# Altium PCB 3 motors 1 board.PcbDocFinal.PcbDoc (part 1 of 2)
Units mil, origin at the board's own origin, x right, y up, seen from the top; angles counter-clockwise.
Board outline 4145 x 3550 mil, 4 copper layers (Top Layer, GND, PWR, Bottom Layer), stack 37.817 mil thick; 71 components, 55 nets, 301 pads, 107 vias.
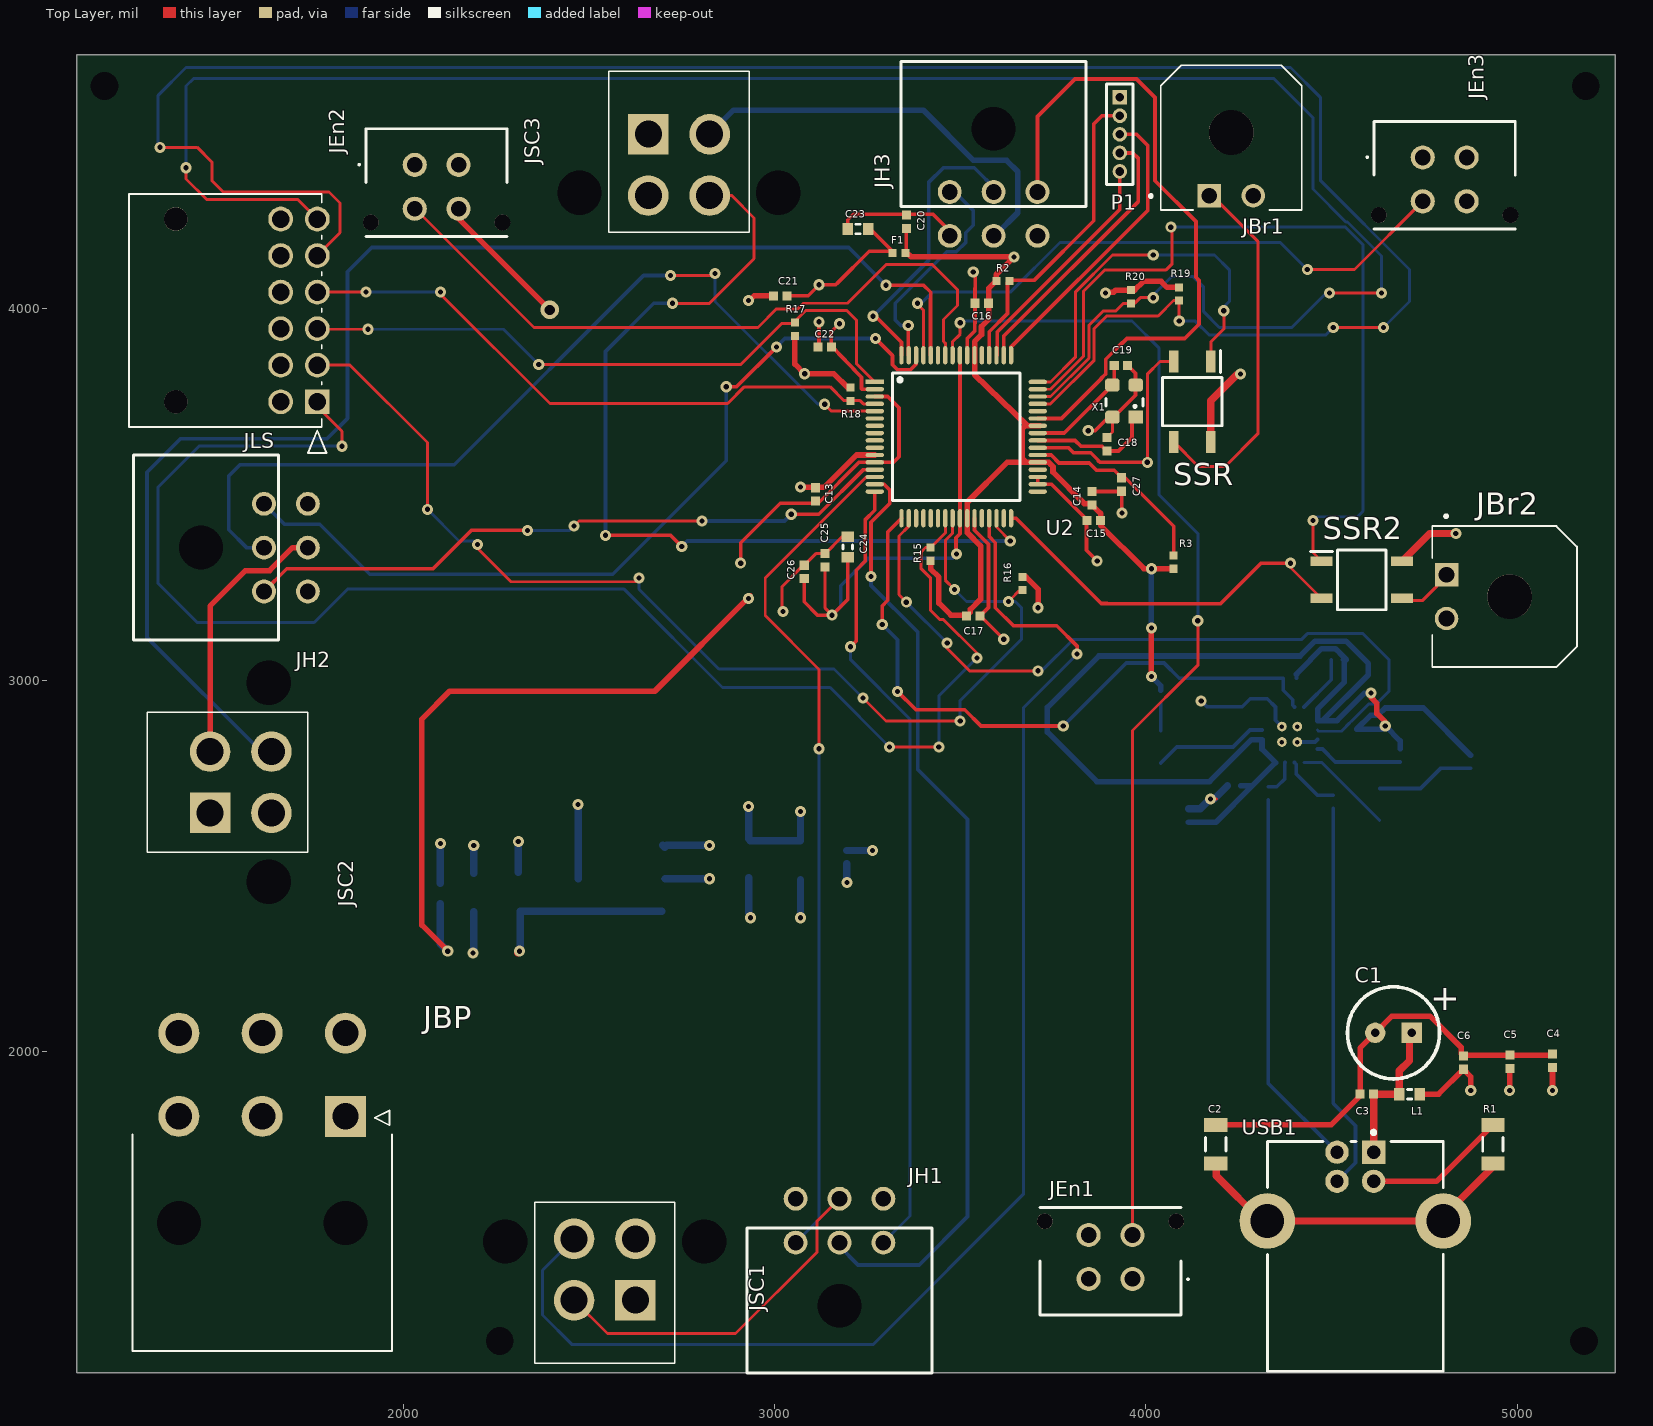
[diagram p0: Top Layer view]
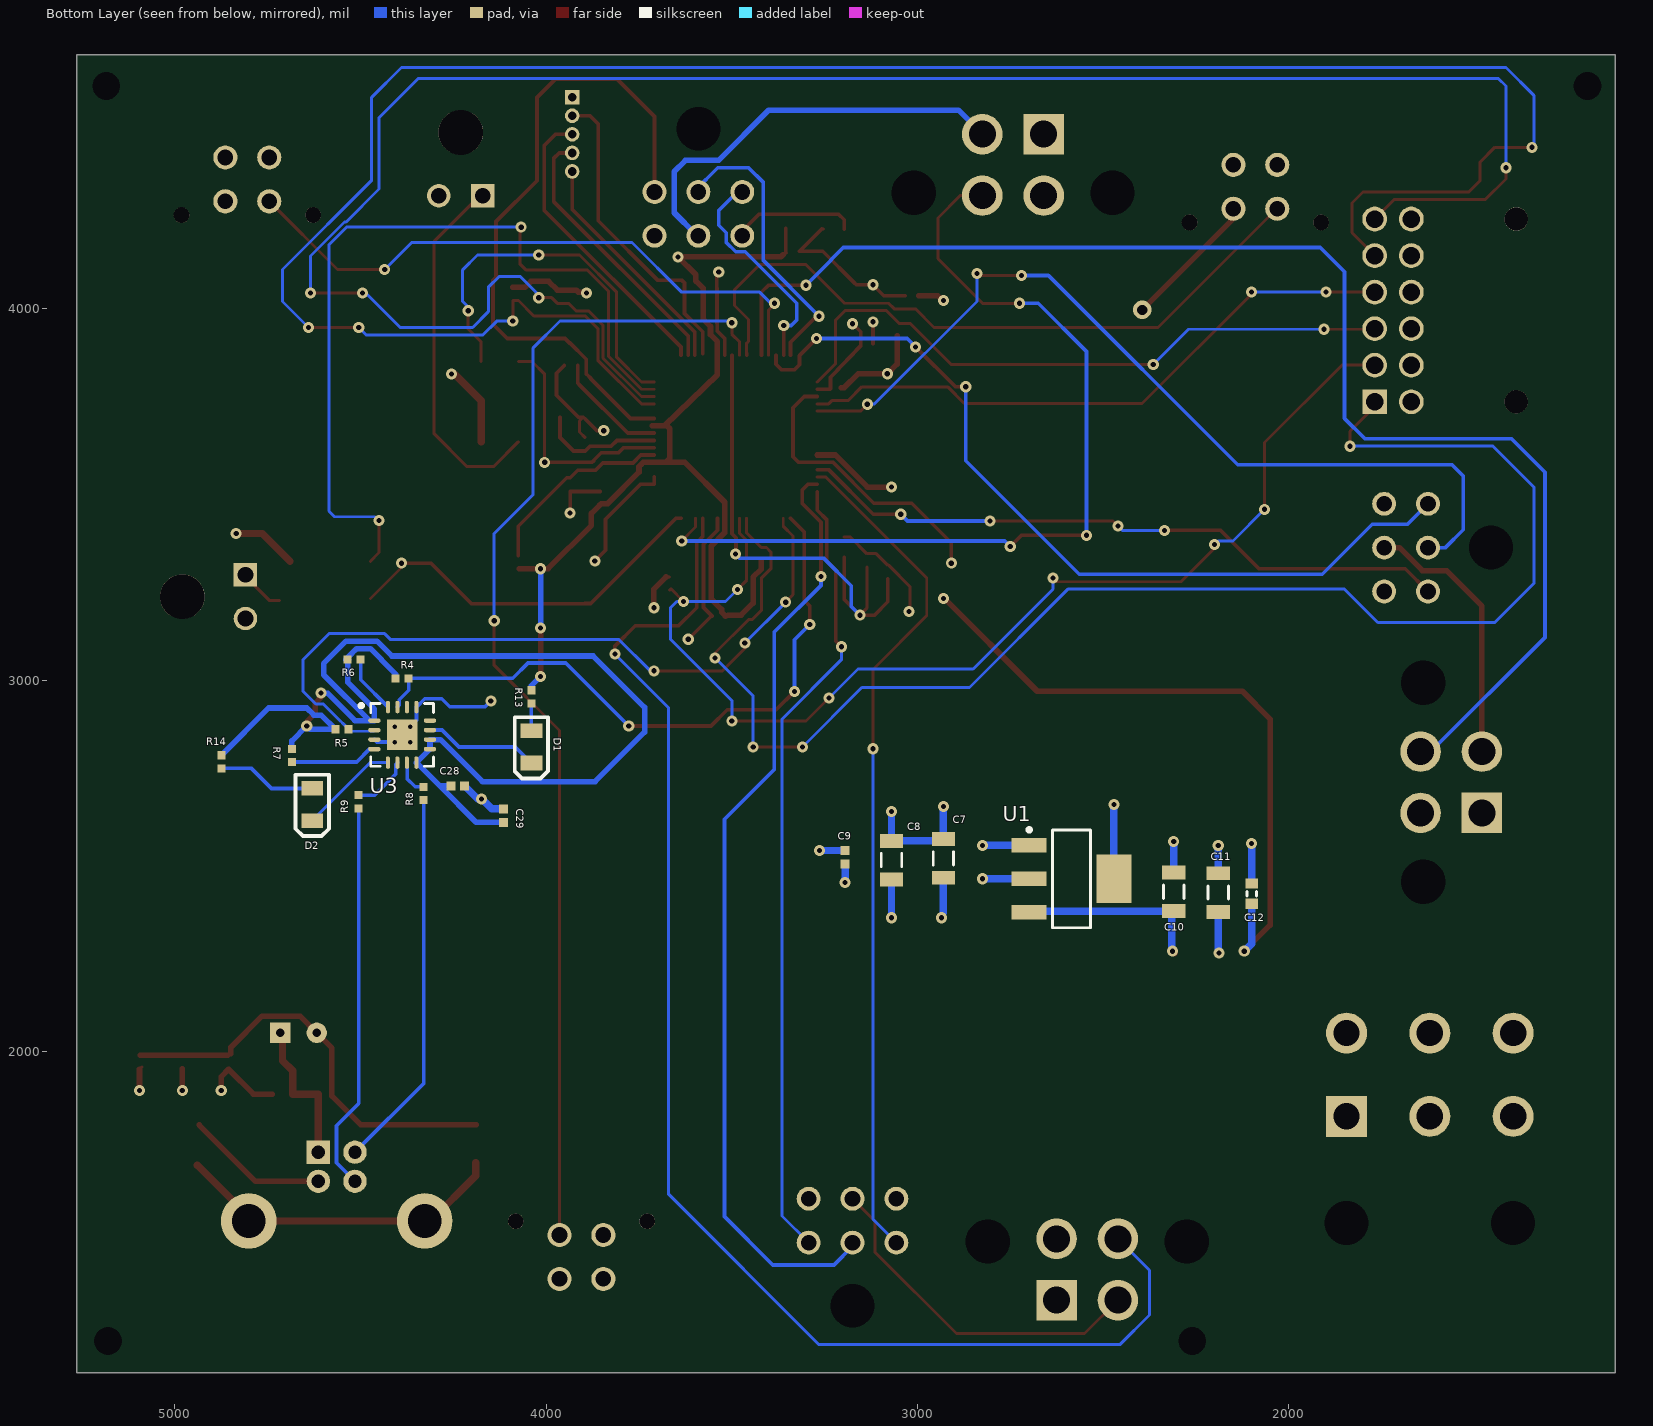
[diagram p1: Bottom Layer view, seen from below]
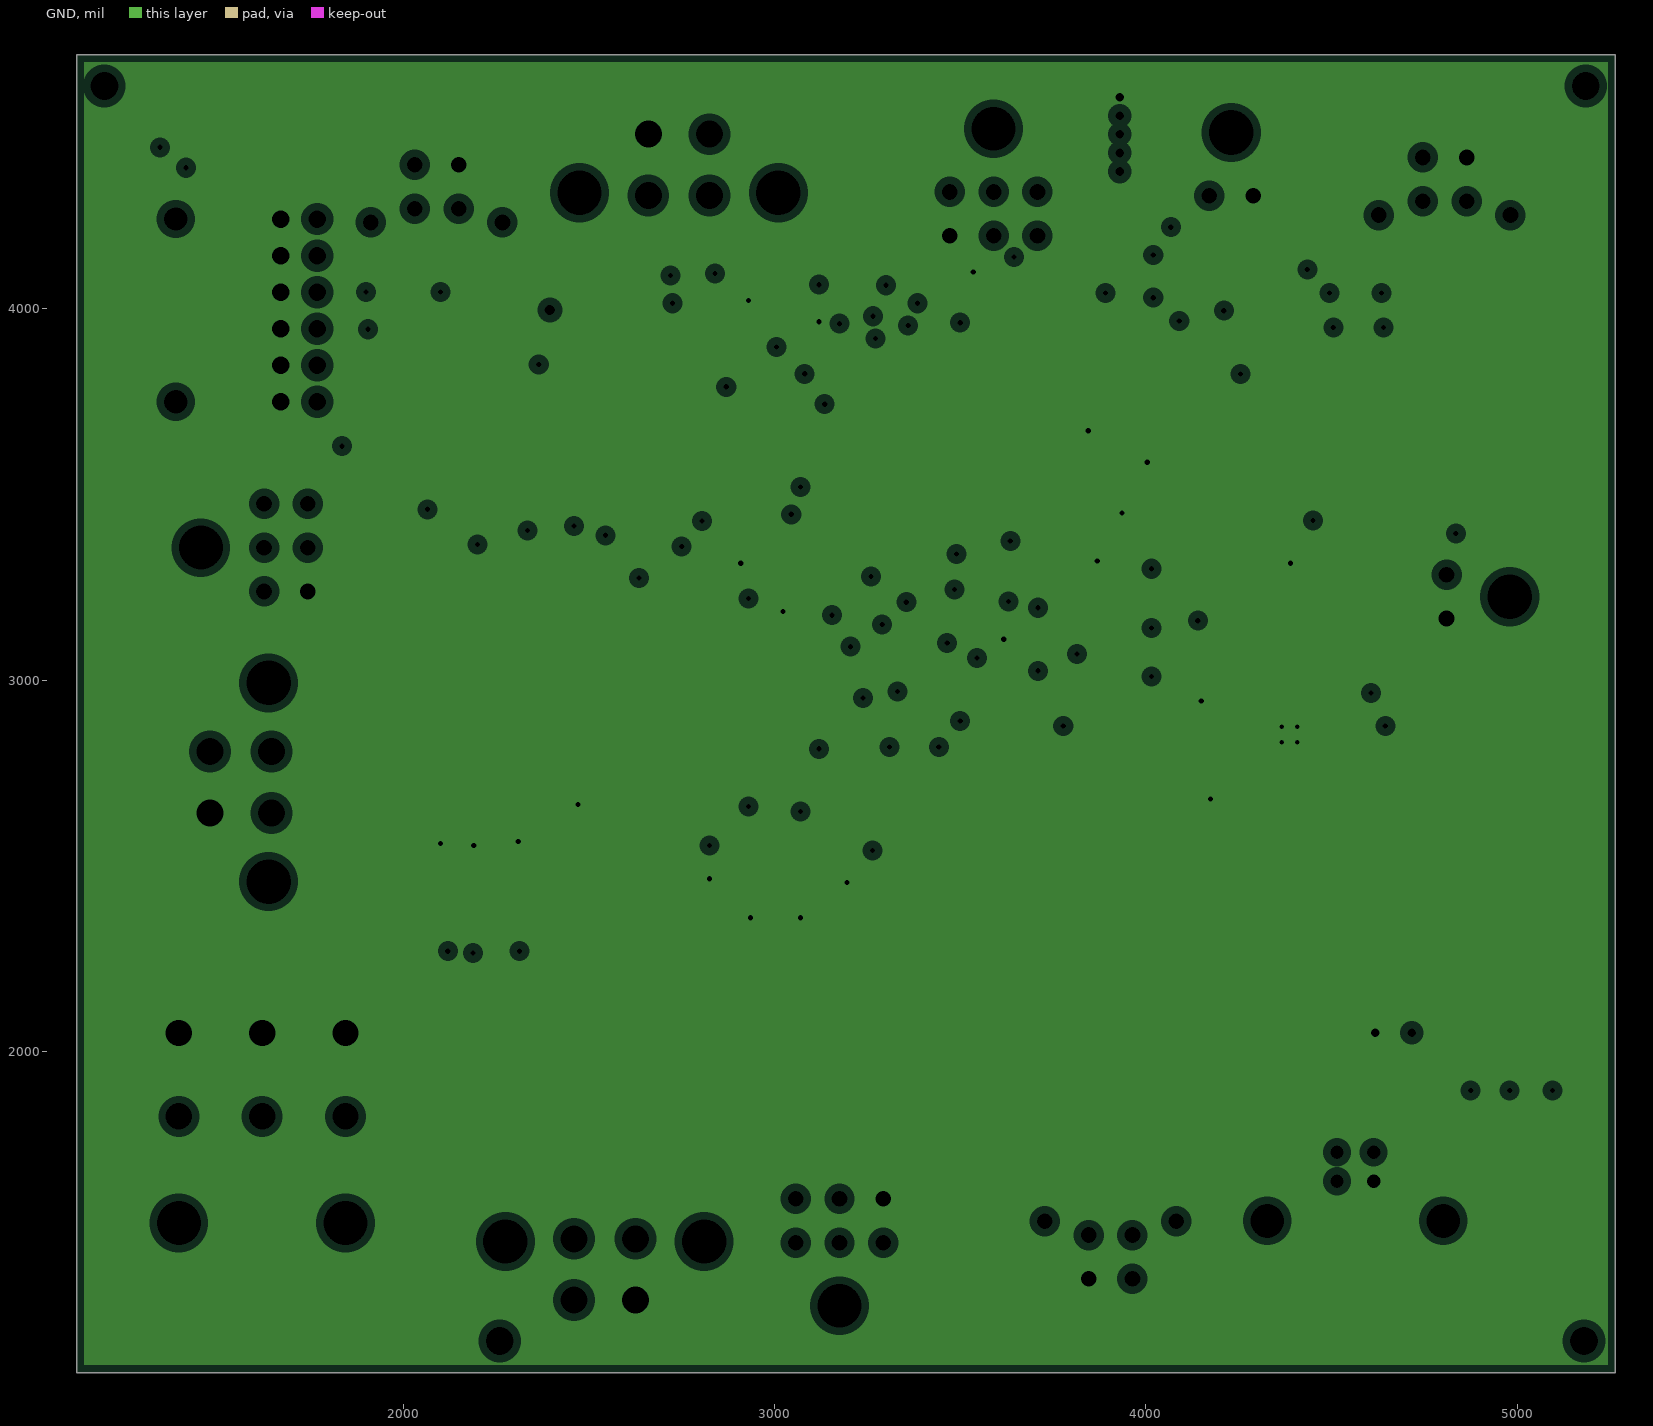
[diagram p2: GND, clearances drawn from the general rule]
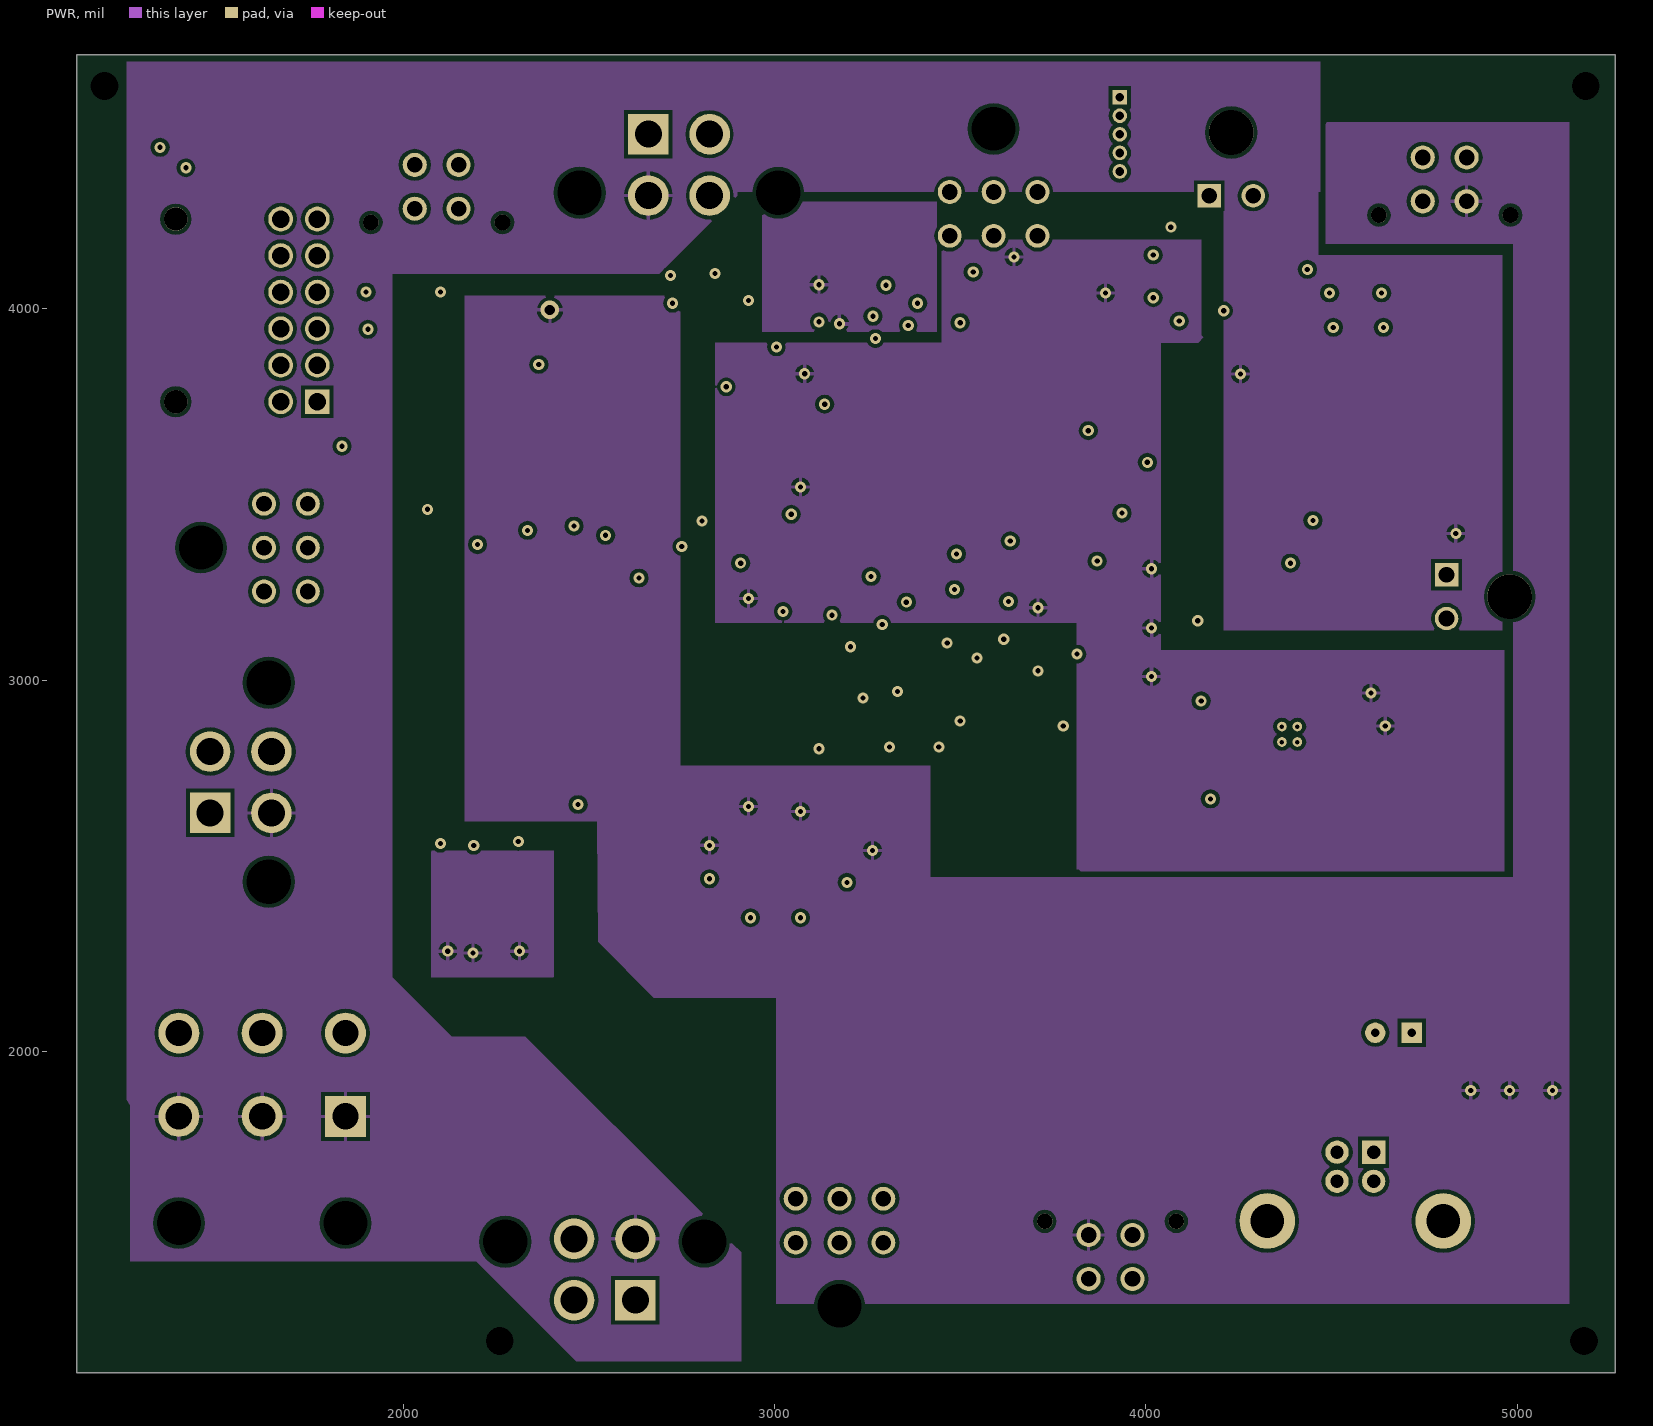
[diagram p3: PWR]
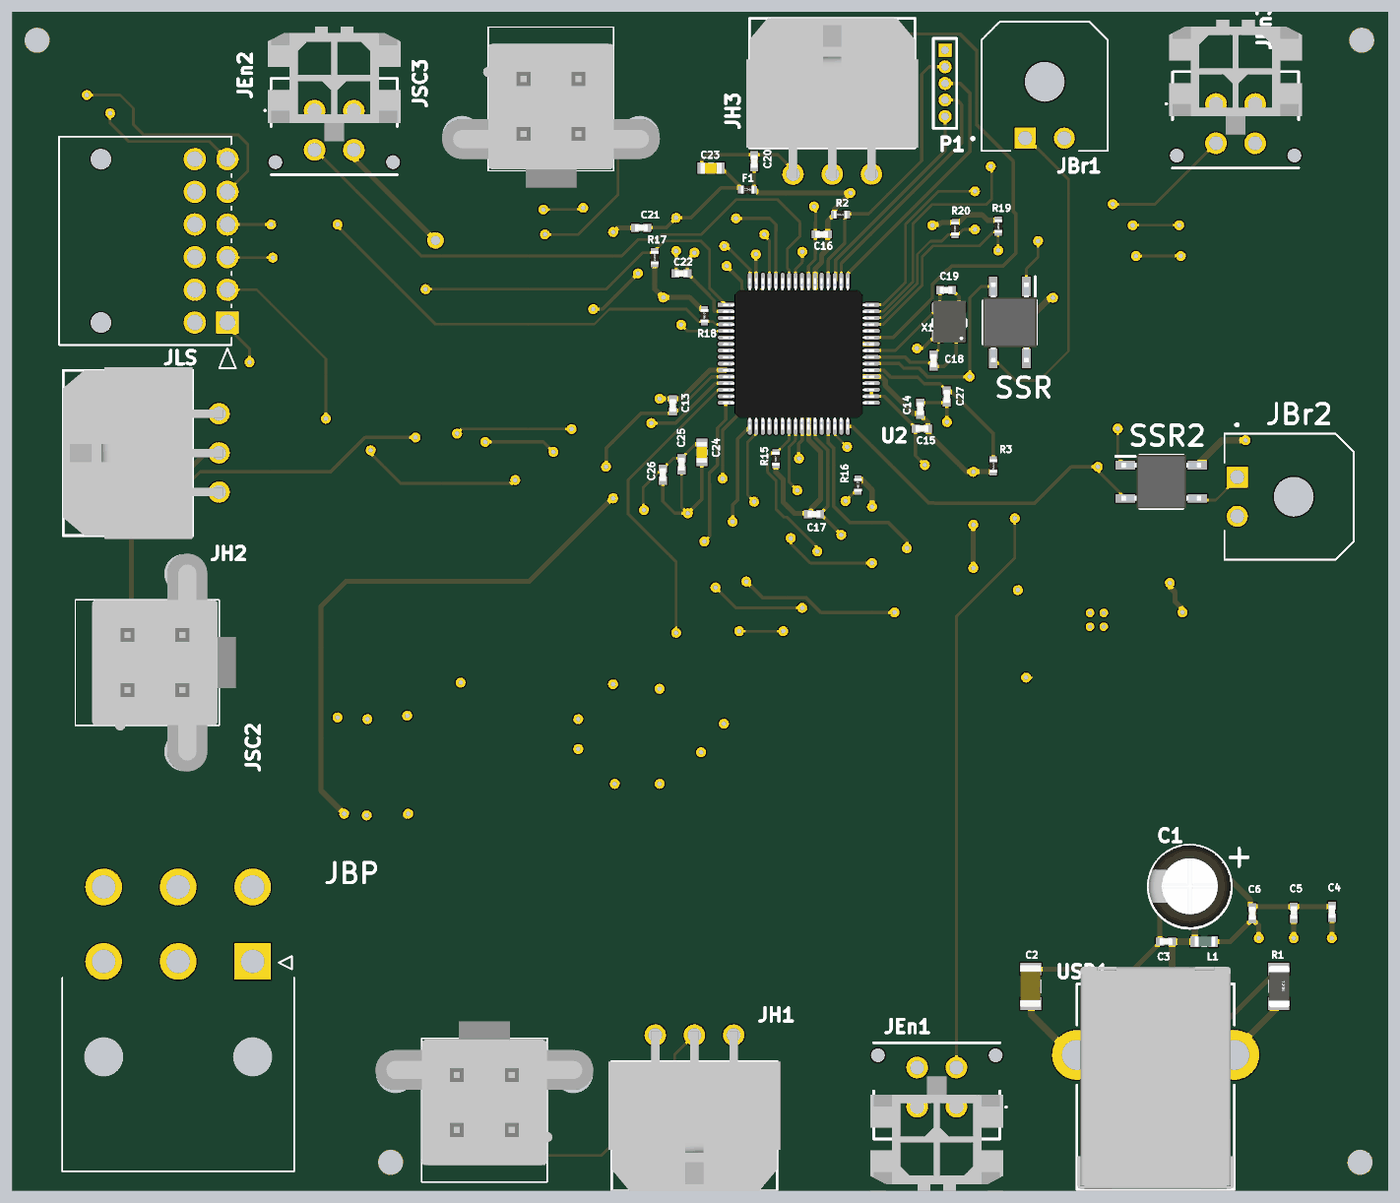
[diagram p4: 3D render of the assembled board from above, using the file's embedded part models]
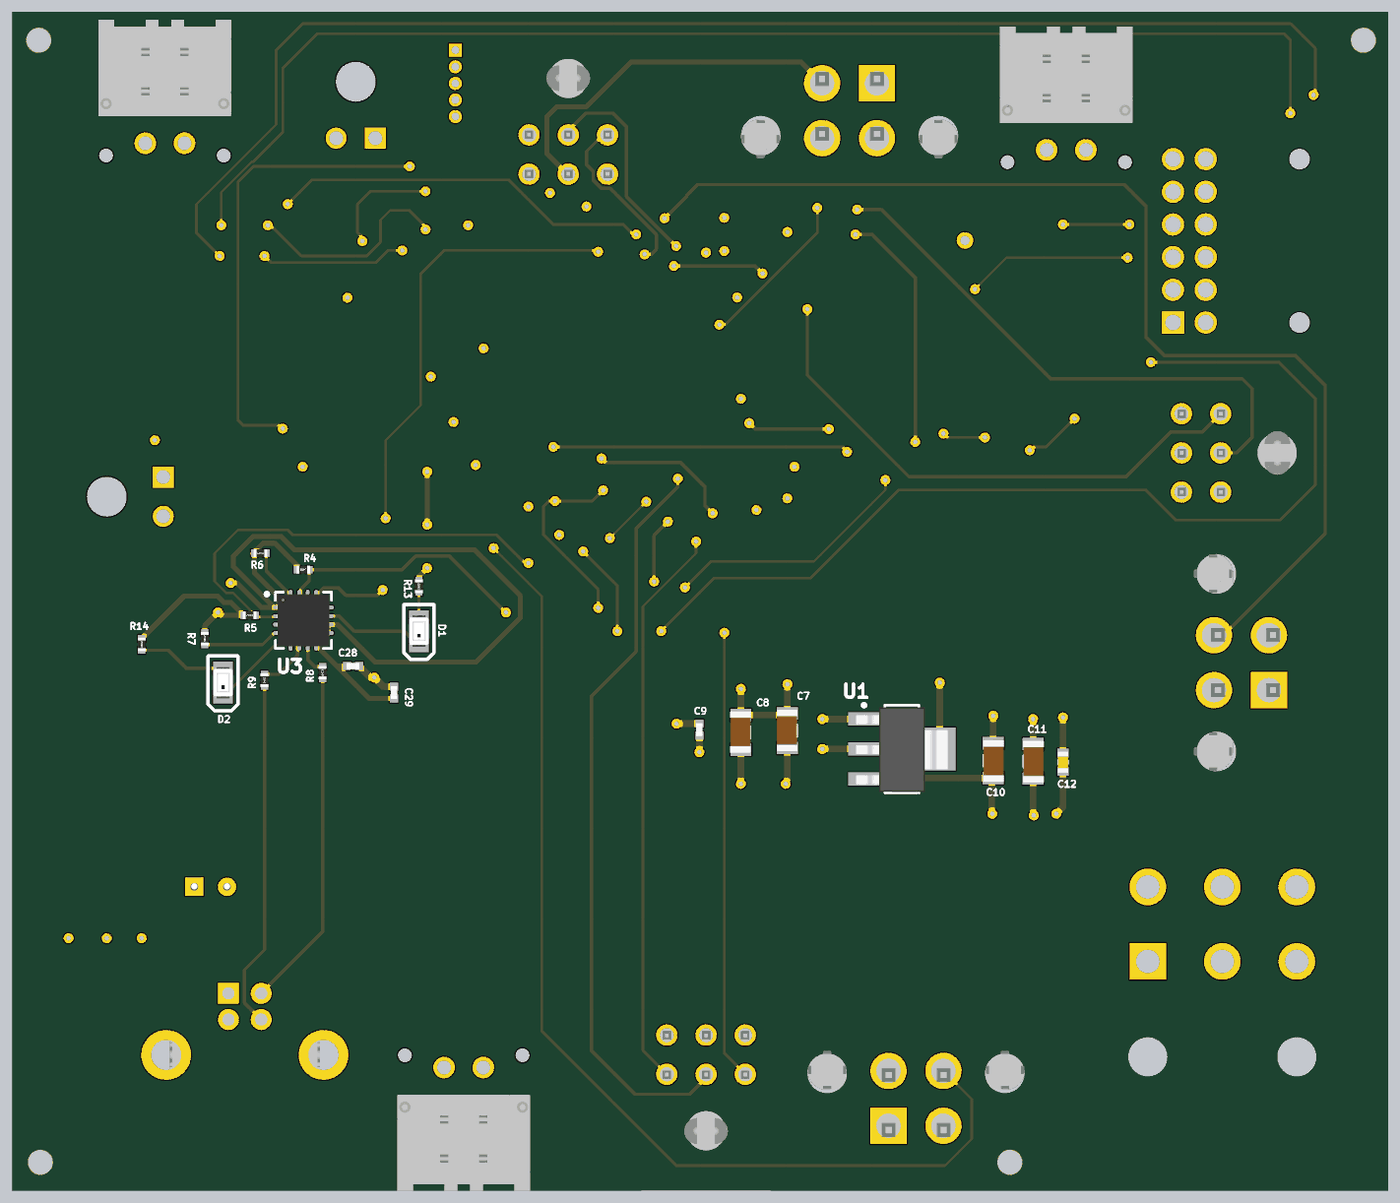
[diagram p5: 3D render of the assembled board from below, using the file's embedded part models]

## Layer stack, top to bottom
Top Solder: solder mask 0.4, Solder Resist, Dk 3.5
Top Layer: signal copper 1.4
Dielectric 3: dielectric 10, Dk 4.2
GND: plane copper 1, net GND
Dielectric 1: dielectric 12.6, FR-4, Dk 4.8
PWR: signal copper 1.417
Dielectric 2: dielectric 10, Dk 4.2
Bottom Layer: signal copper 1.4
Bottom Solder: solder mask 0.4, Solder Resist, Dk 3.5

## Board outline
1120,4685 5265,4685 5265,1135 1120,1135

## Design rules (kind name [scope] priority, off if disabled: settings)
Clearance Clearance_1 [All] p1: gap=10 ignorepadtopadclearanceinfootprint=TRUE except(0: Arc-Hole Track-Hole SMDPad-Hole THPad-Hole Via-Hole Fill-Hole Poly-Hole Region-Hole Text-Hole; 6: Arc-Arc Arc-Track Arc-SMDPad Arc-THPad Track-Track Track-SMDPad Track-THPad SMDPad-SMDPad SMDPad-THPad THPad-THPad)
Clearance [All] p2: gap=10 ignorepadtopadclearanceinfootprint=TRUE except(0: Arc-Hole Track-Hole SMDPad-Hole THPad-Hole Via-Hole Fill-Hole Poly-Hole Region-Hole Text-Hole; 6: Arc-Arc Arc-Track Arc-SMDPad Arc-THPad Track-Track Track-SMDPad Track-THPad SMDPad-SMDPad SMDPad-THPad THPad-THPad)
MinimumSolderMaskSliver [All] p1: minsoldermaskwidth=2
PlaneClearance [All] p1: clearance=20
PlaneConnect [All] p1: planeconnectstyle=Relief reliefexpansion=10 reliefentries=4 reliefconductorwidth=10 reliefairgap=8
PolygonConnect PolygonConnect_2 [All vs IsNamedPolygon('PWR-+24V')] p1: connectstyle=Direct reliefconductorwidth=10 reliefentries=4 polygonreliefangle="90 Angle" airgapwidth=10
PolygonConnect PolygonConnect_1 [All vs IsNamedPolygon('PWR-+24V 1')] p2: connectstyle=Direct reliefconductorwidth=10 reliefentries=4 polygonreliefangle="90 Angle" airgapwidth=10
PolygonConnect [All] p3: connectstyle=Relief reliefconductorwidth=10 reliefentries=4 polygonreliefangle="90 Angle" airgapwidth=10
RoutingVias [All] p1: holewidth=28 width=30 viastyle="Through Hole" minholewidth=14 minwidth=30 maxholewidth=28 maxwidth=50
SilkToSilkClearance [All] p1: silktosilkclearance=2
SilkToSolderMaskClearance [IsPad] p1: minsilkscreentomaskgap=2 clearancetoexposedcopper=TRUE
SolderMaskExpansion [All] p1: expansion=4
Width [All] p1: maxlimit=20 minlimit=6 preferedwidth=10 toplayer_prefwidth=8 midlayer1_minwidth=10 bottomlayer_prefwidth=8 minimp=50.000000 maximp=50.000000 favimp=50.000000
25 further rules are at their usual default settings.

## Components (designator, comment, footprint, x,y, rotation, side; value= is the part's Value field where it differs from the comment)
C1 "100uF" CapAlu6.3mmx12.5mm 4667.18,2050 r0 top
C2 "10nF" CAP_1206 4188.43,1750 r270 top
C3 "10nF" CAP_0402_M 4595.29,1885 r0 top
C4 "100nF" CAP_0402_M 5095.29,1975 r270 top
C5 "2.2uF" CAP_0402_M 4980.29,1971.89 r270 top
C6 "2.2uF" CAP_0402_M 4855.29,1970 r270 top
C7 "100uF" CAP_1206 2930,2520 r270 bottom
C8 "100uF" CAP_1206 3070,2515 r270 bottom
C9 "1uF" CAP_0402_M 3195,2523.11 r90 bottom
C10 "100uF" CAP_1206 2310,2430 r90 bottom
C11 "100uF" CAP_1206 2190,2427.83 r90 bottom
C12 "10uF" CAP_0603 2100,2425 r90 bottom
C13 "10nF" CAP_0402_M 3110,3500 r90 top
C14 "100nF" CAP_0402_M 3855,3490 r270 top
C15 "100nF" CAP_0402_M 3860,3430 r0 top
C16 "10nF" CAP_0402_M 3558.39,4015 r0 top
C17 "100nF" CAP_0402_M 3535.14,3172.6 r180 top
C18 "13pF" CAP_0402_M 3895,3635 r270 top
C19 "13pF" CAP_0402_M 3933.11,3847.4 r180 top
C20 "100nF" CAP_0402_M 3355,4235 r270 top
C21 "10nF" CAP_0402_M 3015,4035 r0 top
C22 "100nF" CAP_0402_M 3135.55,3897.43 r0 top
C23 "10uF" CAP_0603 3225,4215 r0 top
C24 "2.2uF" CAP_0603 3197.44,3358.52 r270 top
C25 "1uF" CAP_0402_M 3136.37,3322.58 r270 top
C26 "100nF" CAP_0402_M 3080,3291.34 r270 top
C27 "100nF" CAP_0402_M 3935,3526.89 r90 top
C28 "100nF" CAP_0402_M 4238.11,2715 r0 bottom
C29 "100nF" CAP_0402_M 4115,2635 r270 bottom
D1 "Led Red" "TOPLED 0805" 4040,2820 r270 bottom
D2 "Led Red" "TOPLED 0805" 4630,2665 r270 bottom
F1 "550mA" RES_0402_M 3335,4150 r180 top
JBP "768250006" 768250006 1844.41,1825 r0 top
JBr1 "436500200" MOLEX_436500200 4230.04,4461.22 r180 top
JBr2 "436500200" MOLEX_436500200 4966.22,3225 r90 top
JEn1 "43045-0427" 43045-0428 3905,1290 r0 top
JEn2 "43045-0427" 43045-0428 2090,4485 r180 top
JEn3 "43045-0427" 43045-0428 4805,4505 r180 top
JH1 "43045-0600" 43045-0600 3175,1315 r0 top
JH2 "43045-0600" 43045-0600 1454.92,3356.89 r270 top
JH3 "43045-0600" 43045-0600 3590,4484.88 r180 top
JLS "1054051112" CON_1053141112 1768.43,3749.72 r270 top
JSC1 "46207-0004" 0462070004 2542.68,1495.35 r0 top
JSC2 "46207-0004" 0462070004 1645,2725 r270 top
JSC3 "46207-0004" 0462070004 2742.68,4305 r180 top
L1 "200R" IND_0603 4710.29,1885 r0 top
P1 "MHDR1X5" MHDR1X5 3930,4570 r270 top
R1 "1M" RES_1206 4935,1750 r270 top
R2 "10k" RES_0402_M 3615,4075 r0 top
R3 "10k" RES_0402_M 4075,3317.72 r90 top
R4 "10k" RES_0402_M 4388.11,3005 r0 bottom
R5 "10k" RES_0402_M 4550,2867.65 r0 bottom
R6 "10k" RES_0402_M 4517.28,3055 r0 bottom
R7 "10k" RES_0402_M 4685,2797.28 r90 bottom
R8 "27" RES_0402_M 4330,2695 r90 bottom
R9 "27" RES_0402_M 4505,2672.28 r90 bottom
R13 "120" RES_0402_M 4040,2955 r90 bottom
R14 "120" RES_0402_M 4875,2780 r90 bottom
R15 "150" RES_0402_M 3420.59,3339.23 r270 top
R16 "150" RES_0402_M 3667.72,3260 r90 top
R17 "150" RES_0402_M 3055,3945 r270 top
R18 "150" RES_0402_M 3205,3770 r90 top
R19 "150" RES_0402_M 4090,4040 r90 top
R20 "150" RES_0402_M 3960,4032.72 r90 top
SSR "CPC1017NTR" SOP254P610X216-4N 4125,3750 r270 top
SSR2 "CPC1017NTR" SOP254P610X216-4N 4581.73,3270 r0 top
U1 "MCP1825S-3302E/DB" SOT230P700X180-4N 2585,2465 r180 bottom
U2 "TM4C123GH6PMI" TSQFP50P1200X1200X120-64N 3341.85,3875 r0 top
U3 "FT230XQ" QFN65P400X400X80_HS-17N 4387.79,2852.67 r180 bottom
USB1 "USB type-B jack" USB2.5-2H4E 4564.19,1689.37 r270 top
X1 "CRYSTAL 16MHZ" CRYSTAL_3.2x2.5 3972.99,3708.39 r180 top

## Footprints (in the part's own frame and the unit in brackets; to place one, negate y for a bottom-side part, rotate by r counter-clockwise, add the part's x,y. Pads: shape width x height; smd on the part's side, far side on the other; paste and mask are expansions set on the pad)
43045-0428 [mm]
  round 1.65 hole 1.07: 1(1.5,2.47) 2(-1.5,2.47) 3(1.5,5.47) 4(-1.5,5.47)
  round 1.07 hole 1.07 unplated: 5(4.5,6.41) 6(-4.5,6.41)
  silkscreen extent -4.82,0 5.32,7.37, body extent -5.07,-3.97 5.07,4.8, height 4.95
43045-0600 [mm]
  round 1.63 hole 1.07: 1(-3,4.32) 2(0,4.32) 3(3,4.32) 4(3,7.32) 5(0,7.32) 6(-3,7.32)
  round 0 hole 3 unplated: 7(0,0)
  silkscreen extent -6.32,-4.6 6.32,5.31, body extent -6.58,-4.62 6.58,7.62, height 8.66
0462070004 [mm]
  rect 2.775x2.775 hole 1.85: 1(2.1,-4.2)
  round 2.775 hole 1.85: 2(-2.1,-4.2) 3(2.1,0) 4(-2.1,0)
  round 1.515 hole 3.03 unplated: 5(-6.8,-0.191) 6(6.8,-0.191)
  silkscreen extent -4.8,-8.5 4.8,2.5, body extent -8.34,-7.22 8.32,3.78, height 13.41
768250006 [mm]
  rect 2.8x2.8 hole 1.8: 1(0,0)
  round 2.8 hole 1.8: 2(-5.7,0) 3(-11.4,0) 4(0,5.7) 5(-5.7,5.7) 6(-11.4,5.7)
  round 1.5 hole 3 unplated: 7(0,-7.3) 8(-11.4,-7.3)
  silkscreen extent -14.58,-16.05 3.17,0.4
CAP_0402_M [mm] "Chip Capacitor, 2-Leads, Body 1.00x0.50mm, IPC Medium Density"
  rect 0.62x0.62 smd: 1(-0.46,0) 2(0.46,0)
  body extent -0.5,-0.26 0.5,0.27, height 0.36
CAP_0603 [mm] "Chip Capacitor, 2-Leads, Body 1,6x0,8mm, IPC High Density"
  rect 0.7x0.85 smd: 1(-0.7,0) 2(0.7,0)
  silkscreen extent -0.15,-0.33 0.15,0.33, body extent -0.8,-0.42 0.8,0.38, height 0.7
CAP_1206 [mm] "Chip Capacitor, 2-Leads, Body 3,1x1,6mm, IPC High Density"
  rect 0.95x1.6 smd: 1(-1.325,0) 2(1.325,0)
  silkscreen extent -0.45,-0.7 0.45,0.7, body extent -1.62,-0.82 1.57,0.78, height 1.6
CapAlu6.3mmx12.5mm [mm] "Capacitor Aluminum 6.3mm OD"
  rect 1.4x1.4 hole 0.6: 1(1.25,0)
  round 1.4 hole 0.6: 2(-1.25,0)
  silkscreen extent -3.15,-3.15 3.15,3.15, body extent -3.15,-3.11 3.15,3.19, height 12
CON_1053141112 [mm]
  rect 1.7x1.7 hole 1.2 mask+0.076: 1(0,0)
  round 1.7 hole 1.2 mask+0.076: 2(-2.5,0) 3(-5,0) 4(-7.5,0) 5(-10,0) 6(-12.5,0) 7(0,-2.5) 8(-2.5,-2.5) 9(-5,-2.5) 10(-7.5,-2.5) 11(-10,-2.5) 12(-12.5,-2.5)
  round 1.6 hole 1.6 unplated mask+0.076: 13(0,-9.68) 14(-12.5,-9.68)
  silkscreen extent -14.22,-12.88 3.5,0.64, body extent 0,0 0.25,0.25, height 0.25
CRYSTAL_3.2x2.5 [mm]
  rect 1x0.9 smd: 1(0,0)
  rrect50% 1x0.9 smd: 2(0,-2.2) 3(1.6,-2.2) 4(1.6,0)
  silkscreen extent -0.51,-1.27 2.03,-0.69, body extent -0.5,-2.7 2,0.5, height 0.93
IND_0603 [mm]
  rect 0.7x0.85 smd: 1(-0.7,0) 2(0.7,0)
  silkscreen extent -0.15,-0.33 0.15,0.33, body extent -0.74,-0.4 0.86,0.4, height 0.95
MHDR1X5 [mm] "Connector; Header; 5 Position"
  rect 1x1 hole 0.6: 1(0,0)
  round 1 hole 0.6: 2(1.27,0) 3(2.54,0) 4(3.81,0) 5(5.08,0)
  silkscreen extent -0.9,-0.9 5.98,0.9
MOLEX_436500200 [mm]
  rect 1.605x1.605 hole 1.07: 1(1.5,3.97)
  round 1.605 hole 1.07: 2(-1.5,3.97)
  round 3.05 hole 3.05 unplated: ""(0,-0.35)
  silkscreen extent -4.82,-4.95 5.6,4.95
QFN65P400X400X80_HS-17N [mm] "QFN, 16-Leads, Body 4.00x4.00mm, Pitch 0.65mm, Thermal Pad 2.08x2.08mm, IPC Medium Density"
  oval 0.85x0.3 smd: 1(-1.9,0.975) 2(-1.9,0.325) 3(-1.9,-0.325) 4(-1.9,-0.975) 9(1.9,-0.975) 10(1.9,-0.325) 11(1.9,0.325) 12(1.9,0.975)
  oval 0.3x0.85 smd: 5(-0.975,-1.9) 6(-0.325,-1.9) 7(0.325,-1.9) 8(0.975,-1.9) 13(0.975,1.9) 14(0.325,1.9) 15(-0.325,1.9) 16(-0.975,1.9)
  round 0.66 hole 0.305: 17(-0.516,-0.493) 17(-0.516,0.567) 17(0.538,-0.493) 17(0.538,0.567)
  rect 2.08x2.08 smd: 17(0,0)
  silkscreen extent -2.93,-2.15 2.15,2.15, body extent -2,-2 2,2, height 0.92
RES_0402_M [mm] "Chip Resistor, 2-Leads, Body 1.00x0.50mm, IPC Medium Density"
  rect 0.55x0.55 smd: 1(-0.45,0) 2(0.45,0)
  body extent -0.52,-0.3 0.52,0.3, height 0.34
RES_1206 [mm] "Chip Resistor 2-Leads, Body 3,1x1,6mm, IPC High Density"
  rect 0.95x1.6 smd: 1(-1.325,0) 2(1.325,0)
  silkscreen extent -0.45,-0.7 0.45,0.7, body extent -1.59,-0.76 1.61,0.84, height 1
SOP254P610X216-4N [mm]
  rect 1.5x0.65 smd: 1(-2.75,1.27) 2(-2.75,-1.27) 3(2.75,-1.27) 4(2.75,1.27)
  silkscreen extent -3.5,-2.04 1.65,2.04, body extent -3.05,-2.04 3.05,2.04, height 2.16
SOT230P700X180-4N [mm] "SOT223, 4-Leads, Body 6,7x7,3mm (max), Pitch 2,30mm, IPC Medium Density"
  rect 2.4x1 smd: 1(-2.9,2.3) 2(-2.9,0) 3(-2.9,-2.3)
  rect 2.4x3.3 smd: 4(2.9,0)
  silkscreen extent -3.03,-3.35 1.3,3.47, body extent -3.5,-3.3 3.5,3.2, height 1.69
"TOPLED 0805" [mm]
  rect 1x1.5 smd: 1(-1.1,0) 2(1.1,0)
  silkscreen extent -2.03,-1.14 2.16,1.14, body extent -1.2,-0.74 1.2,0.76, height 1.45
TSQFP50P1200X1200X120-64N [mm] "TSQFP, 64-Leads, Body 12,0x12,0mm (max), Pitch 0,50mm, IPC Medium Density"
  rect 1.25x0.3 smd: 1(-1.825,-1.825)
  oval 1.25x0.3 smd: 2(-1.825,-2.325) 3(-1.825,-2.825) 4(-1.825,-3.325) 5(-1.825,-3.825) 6(-1.825,-4.325) 7(-1.825,-4.825) 8(-1.825,-5.325) 9(-1.825,-5.825) 10(-1.825,-6.325) 11(-1.825,-6.825) 12(-1.825,-7.325) 13(-1.825,-7.825) 14(-1.825,-8.325) 15(-1.825,-8.825) 16(-1.825,-9.325) 33(9.325,-9.325) 34(9.325,-8.825) 35(9.325,-8.325) 36(9.325,-7.825) 37(9.325,-7.325) 38(9.325,-6.825) 39(9.325,-6.325) 40(9.325,-5.825) 41(9.325,-5.325) 42(9.325,-4.825) 43(9.325,-4.325) 44(9.325,-3.825) 45(9.325,-3.325) 46(9.325,-2.825) 47(9.325,-2.325) 48(9.325,-1.825)
  oval 0.3x1.25 smd: 17(0,-11.15) 18(0.5,-11.15) 19(1,-11.15) 20(1.5,-11.15) 21(2,-11.15) 22(2.5,-11.15) 23(3,-11.15) 24(3.5,-11.15) 25(4,-11.15) 26(4.5,-11.15) 27(5,-11.15) 28(5.5,-11.15) 29(6,-11.15) 30(6.5,-11.15) 31(7,-11.15) 32(7.5,-11.15) 49(7.5,0) 50(7,0) 51(6.5,0) 52(6,0) 53(5.5,0) 54(5,0) 55(4.5,0) 56(4,0) 57(3.5,0) 58(3,0) 59(2.5,0) 60(2,0) 61(1.5,0) 62(1,0) 63(0.5,0) 64(0,0)
  silkscreen extent -0.6,-9.92 8.1,-1.22, body extent -2.05,-11.38 9.53,0.2, height 1
USB2.5-2H4E [mm] "Connector; USB1.1, Type B, Thru-Hole; 4 Position; Right Angle"
  rect 1.6x1.6 hole 0.92: 1(-1,1.25)
  round 1.6 hole 0.92: 2(-1,-1.25) 3(1,-1.25) 4(1,1.25)
  round 3.8 hole 2.3: 5(3.71,6.02) 6(3.71,-6.02)
  silkscreen extent -2.47,-6.02 13.99,6.02, body extent -3.03,-6 13.97,6, height 10.9

## Part data
C1: library part 100uF_35v_6.3x12.5, "Capacitor 35v 100uF 6.3mm", Capacitance=100µF, ESR (Equivalent Series Resistance)=-, Lifetime @ Temp.="5000 Hrs @ 105°C", Manufacturer=Nichicon, Manufacturer Part Number=UHV1V101MED, Operating Temperature="-40°C ~ 105°C", Package / Case="Radial, Can", Ripple Current="220mA @ 120Hz", Supplier Part Number 1=493-13394-ND, Tolerance=±20%, Voltage Rating=35V, Applications="General Purpose", Category=Capacitors, ComponentLink1Description=http://nichicon-us.com/english/products/pdfs/e-uhv.pdf, ComponentLink1URL=http://nichicon-us.com/english/products/pdfs/e-uhv.pdf, Height - Seated (Max)="0.492\" (12.50mm)", Impedance="100 mOhm", Lead Spacing="0.098\" (2.50mm)", Mounting Type="Through Hole", Packaging=Bulk, Polarization=Polar, Pricing 1="1=0.46, 10=0.32, 25=0.262, 50=0.224, 100=0.1919, 250=0.15992, 500=0.14394, 1000=0.12155, 2500=0.11515 (CAD)", RoHS="RoHS Compliant", Size / Dimension="0.248\" Dia (6.30mm)", Stock 1=5561, Supplier 1=Digi-Key, Surface Mount Land Size=-
C2: library part 10nF_500V_1206, "CAP CER 10000PF 500V X7R 1206", Capacitance=10000pF, Manufacturer="Samsung Electro-Mechanics America, Inc", Manufacturer Part Number=CL31B103KGFNNNE, Operating Temperature="-55°C ~ 125°C", Package / Case="1206 (3216 Metric)", Ratings=-, Supplier Part Number 1=1276-3076-1-ND, Temperature Coefficient=X7R, Tolerance=±10%, Voltage - Rated=500V, Applications="General Purpose", Category=Capacitors, ComponentLink1Description=http://www.samsungsem.com/kr/front/downloadcms.do?path=/kr/support/product-search/mlcc/__icsFiles/afieldfile/2014/11/05&fileName=S_CL31B103KGFNNNE.pdf, ComponentLink1URL=http://www.samsungsem.com/kr/front/downloadcms.do?path=/kr/support/product-search/mlcc/__icsFiles/afieldfile/2014/11/05&fileName=S_CL31B103KGFNNNE.pdf, Features=-, Height - Seated (Max)=-, Lead Spacing=-, Lead Style=-, Mounting Type="Surface Mount, MLCC", Packaging="Cut Tape (CT)", Pricing 1="1=0.34, 10=0.28, 25=0.192, 100=0.1398, 500=0.09266, 1000=0.08216 (CAD)", RoHS="RoHS Compliant", Size / Dimension="0.126\" L x 0.063\" W (3.20mm x 1.60mm)", Stock 1=9075, Supplier 1=Digi-Key, Thickness (Max)="0.055\" (1.40mm)"
C3 C13 C16 C21: library part 10nF_50V_0402, "CAP CER 10000PF 50V 10% X7R 0402", Capacitance=10000pF, Manufacturer=Kemet, Manufacturer Part Number=C0402C103K5RACTU, Operating Temperature="-55°C ~ 125°C", Package / Case="0402 (1005 Metric)", Ratings=-, Supplier Part Number 1=399-3066-1-ND, Temperature Coefficient=X7R, Tolerance=±10%, Voltage - Rated=50V, Applications="General Purpose", Category=Capacitors, ComponentLink1Description=http://www.kemet.com/docfinder?Partnumber=C0402C103K5RACTU, ComponentLink1URL=http://www.kemet.com/docfinder?Partnumber=C0402C103K5RACTU, Features=-, Height - Seated (Max)=-, Lead Spacing=-, Lead Style=-, Mounting Type="Surface Mount, MLCC", Packaging="Cut Tape (CT)", Pricing 1="1=0.14, 10=0.037, 25=0.026, 50=0.0198, 100=0.0166, 250=0.01364, 1000=0.00893, 2500=0.00804, 5000=0.00744 (CAD)", RoHS="RoHS Compliant", Size / Dimension="0.039\" L x 0.020\" W (1.00mm x 0.50mm)", Stock 1=3556921, Supplier 1=Digi-Key, Thickness (Max)="0.022\" (0.55mm)"
C4 C14 C15 C17 C20 C22 C26 C27 C28 C29: library part 100nF_50V_0402, "CAP CER 100NF 50V 20% X5R 0402", Capacitance=0.1µF, Manufacturer="TDK Corporation", Manufacturer Part Number=C1005X5R1H104M050BB, Operating Temperature="-55°C ~ 85°C", Package / Case="0402 (1005 Metric)", Ratings=-, Supplier Part Number 1=445-5943-1-ND, Temperature Coefficient=X5R, Tolerance=±20%, Voltage - Rated=50V, Applications="General Purpose", Category=Capacitors, ComponentLink1Description=http://product.tdk.com/en/catalog/datasheets/mlcc_commercial_general_en.pdf, ComponentLink1URL=http://product.tdk.com/en/catalog/datasheets/mlcc_commercial_general_en.pdf, Features=-, Height - Seated (Max)=-, Lead Spacing=-, Lead Style=-, Mounting Type="Surface Mount, MLCC", Packaging="Cut Tape (CT)", Pricing 1="1=0.18, 10=0.122, 100=0.0579, 250=0.04872, 500=0.0408, 1000=0.03348, 5000=0.02831 (CAD)", RoHS="RoHS Compliant", Size / Dimension="0.039\" L x 0.020\" W (1.00mm x 0.50mm)", Stock 1=218263, Supplier 1=Digi-Key, Thickness (Max)="0.022\" (0.55mm)"
C5 C6: library part 2.2uF_10V_0402, "CAP CER 2.2UF 10V 20% X5R 0402", Capacitance=2.2µF, Manufacturer="Taiyo Yuden", Manufacturer Part Number=LMK105BJ225MV-F, Operating Temperature="-55°C ~ 85°C", Package / Case="0402 (1005 Metric)", Ratings=-, Supplier Part Number 1=587-3153-1-ND, Temperature Coefficient=X5R, Tolerance=±20%, Voltage - Rated=10V, Applications="General Purpose", Category=Capacitors, ComponentLink1Description=http://www.yuden.co.jp/ut/product/category/capacitor/LMK105BJ225MV-F.pdf, ComponentLink1URL=http://www.yuden.co.jp/ut/product/category/capacitor/LMK105BJ225MV-F.pdf, Features=-, Height - Seated (Max)=-, Lead Spacing=-, Lead Style=-, Mounting Type="Surface Mount, MLCC", Packaging="Cut Tape (CT)", Pricing 1="1=0.26, 10=0.173, 50=0.105, 100=0.0881, 250=0.07132, 500=0.0629, 1000=0.05348, 2500=0.04928, 5000=0.04509 (CAD)", RoHS="RoHS Compliant", Size / Dimension="0.039\" L x 0.020\" W (1.00mm x 0.50mm)", Stock 1=258065, Supplier 1=Digi-Key, Thickness (Max)="0.022\" (0.55mm)"
C7 C8 C10 C11: library part 100uF_6.3v_1206_X5R, "CAP CER 100UF 6.3V X5R 1206", Capacitance=100µF, Manufacturer="Murata Electronics North America", Manufacturer Part Number=GRM31CR60J107ME39L, Operating Temperature="-55°C ~ 85°C", Package / Case="1206 (3216 Metric)", Ratings=-, Supplier Part Number 1=490-4539-1-ND, Temperature Coefficient=X5R, Tolerance=±20%, Voltage - Rated=6.3V, Applications="General Purpose", Category=Capacitors, ComponentLink1Description=http://www.murata.com/~/media/webrenewal/support/library/catalog/products/capacitor/mlcc/c02e.pdf, ComponentLink1URL=http://www.murata.com/~/media/webrenewal/support/library/catalog/products/capacitor/mlcc/c02e.pdf, Features=-, Height - Seated (Max)=-, Lead Spacing=-, Lead Style=-, Mounting Type="Surface Mount, MLCC", Packaging="Cut Tape (CT)", Pricing 1="1=1.23, 10=1.048, 50=0.771, 100=0.6128, 250=0.51396, 500=0.46456, 1000=0.42502 (CAD)", RoHS="RoHS Compliant", Size / Dimension="0.126\" L x 0.063\" W (3.20mm x 1.60mm)", Stock 1=450179, Supplier 1=Digi-Key, Thickness (Max)="0.071\" (1.80mm)"
C9 C25: library part 1uF_25V_0402, "CAP CER 1UF 25V 10% X5R 0402", Capacitance=1µF, Manufacturer="TDK Corporation", Manufacturer Part Number=C1005X5R1E105K050BC, Operating Temperature="-55°C ~ 85°C", Package / Case="0402 (1005 Metric)", Ratings=-, Supplier Part Number 1=445-9066-1-ND, Temperature Coefficient=X5R, Tolerance=±10%, Voltage - Rated=25V, Applications="General Purpose", Category=Capacitors, ComponentLink1Description=http://product.tdk.com/en/catalog/datasheets/mlcc_commercial_general_en.pdf, ComponentLink1URL=http://product.tdk.com/en/catalog/datasheets/mlcc_commercial_general_en.pdf, Features=-, Height - Seated (Max)=-, Lead Spacing=-, Lead Style=-, Mounting Type="Surface Mount, MLCC", Packaging="Cut Tape (CT)", Pricing 1="1=0.27, 10=0.185, 100=0.0878, 250=0.074, 500=0.06196, 1000=0.05087, 5000=0.04301 (CAD)", RoHS="RoHS Compliant", Size / Dimension="0.039\" L x 0.020\" W (1.00mm x 0.50mm)", Stock 1=310467, Supplier 1=Digi-Key, Thickness (Max)="0.022\" (0.55mm)"
C12 C23: library part 10uF_10V_0603, "CAP CER 10UF 10V 20% X5R 0603", Capacitance=10µF, Manufacturer="Taiyo Yuden", Manufacturer Part Number=LMK107BBJ106MAHT, Operating Temperature="-55°C ~ 85°C", Package / Case="0603 (1608 Metric)", Ratings=AEC-Q200, Supplier Part Number 1=587-3412-1-ND, Temperature Coefficient=X5R, Tolerance=±20%, Voltage - Rated=10V, Applications=Automotive, Category=Capacitors, ComponentLink1Description=http://www.yuden.co.jp/productdata/catalog/en/mlcc01_hq_e.pdf, ComponentLink1URL=http://www.yuden.co.jp/productdata/catalog/en/mlcc01_hq_e.pdf, Features=-, Height - Seated (Max)=-, Lead Spacing=-, Lead Style=-, Mounting Type="Surface Mount, MLCC", Packaging="Cut Tape (CT)", Pricing 1="1=0.5, 10=0.437, 50=0.266, 100=0.2189, 250=0.17516, 500=0.15952, 1000=0.14107 (CAD)", RoHS="RoHS Compliant", Size / Dimension="0.063\" L x 0.031\" W (1.60mm x 0.80mm)", Stock 1=90195, Supplier 1=Digi-Key, Thickness (Max)="0.035\" (0.90mm)"
C18 C19: library part 13pF_50V_0402, "CAP CER 13PF 50V 5% NP0 0402", Manufacturer="Samsung Electro-Mechanics America, Inc", Manufacturer Part Number=CL05C130JB5NNNC, Operating Temperature="-55°C ~ 125°C", Package / Case="0402 (1005 Metric)", Ratings=-, Supplier Part Number 1=1276-1642-1-ND, Temperature Coefficient="C0G, NP0", Tolerance=±5%, Voltage - Rated=50V, Applications="General Purpose", Capacitance=13pF, Category=Capacitors, ComponentLink1Description=http://www.samsungsem.com/kr/front/downloadcms.do?path=/kr/support/product-search/mlcc/__icsFiles/afieldfile/2014/11/05&fileName=S_CL05C130JB5NNNC.pdf, ComponentLink1URL=http://www.samsungsem.com/kr/front/downloadcms.do?path=/kr/support/product-search/mlcc/__icsFiles/afieldfile/2014/11/05&fileName=S_CL05C130JB5NNNC.pdf, Features=-, Height - Seated (Max)=-, Lead Spacing=-, Lead Style=-, Mounting Type="Surface Mount, MLCC", Packaging="Cut Tape (CT)", Pricing 1="1=0.14, 10=0.064, 25=0.0448, 100=0.0291, 500=0.02032, 1000=0.01583, 2500=0.01425, 5000=0.01319 (CAD)", RoHS="RoHS Compliant", Size / Dimension="0.039\" L x 0.020\" W (1.00mm x 0.50mm)", Stock 1=16490, Supplier 1=Digi-Key, Thickness (Max)="0.022\" (0.55mm)"
C24: library part 2.2uF_35V_0603, "CAP CER 2.2UF 35V 10% X5R 0603", Capacitance=2.2µF, Manufacturer="Murata Electronics North America", Manufacturer Part Number=GRM188R6YA225KA12D, Operating Temperature="-55°C ~ 85°C", Package / Case="0603 (1608 Metric)", Ratings=-, Supplier Part Number 1=490-7204-1-ND, Temperature Coefficient=X5R, Tolerance=±10%, Voltage - Rated=35V, Applications="General Purpose", Category=Capacitors, ComponentLink1Description=http://www.murata.com/~/media/webrenewal/support/library/catalog/products/capacitor/mlcc/c02e.ashx, ComponentLink1URL=http://www.murata.com/~/media/webrenewal/support/library/catalog/products/capacitor/mlcc/c02e.ashx, Features=-, Height - Seated (Max)=-, Lead Spacing=-, Lead Style=-, Mounting Type="Surface Mount, MLCC", Packaging="Cut Tape (CT)", Pricing 1="1=0.31, 10=0.214, 50=0.1298, 100=0.109, 250=0.08832, 500=0.07792, 1000=0.06624 (CAD)", RoHS="RoHS Compliant", Size / Dimension="0.063\" L x 0.031\" W (1.60mm x 0.80mm)", Stock 1=55248, Supplier 1=Digi-Key, Thickness (Max)="0.031\" (0.80mm)"
D1 D2: library part "TOPLED 0803", "LED TOPLED 630NM SUP RED CLR SMD", Color=Red, Current - Test=2mA, Luminous Flux @ Current - Test="25 mlm", Manufacturer="OSRAM Opto Semiconductors Inc", Manufacturer Part Number="LS M67K-H2L1-1-Z", Millicandela Rating=8.78mcd, Package / Case="2-SMD, J-Lead", Supplier Part Number 1=475-2510-1-ND, Voltage - Forward (Vf) (Typ)=1.8V, Category=Optoelectronics, ComponentLink1Description=http://media.digikey.com/pdf/Data%20Sheets/Osram%20PDFs/LS,LO,LY_M67K.pdf, ComponentLink1URL=http://media.digikey.com/pdf/Data%20Sheets/Osram%20PDFs/LS,LO,LY_M67K.pdf, Height=1.30mm, Lens Style/Size="Rectangle with Flat Top, 1.5mm x 1mm", Lens Type=Clear, Mounting Type="Surface Mount", Packaging="Cut Tape (CT)", Pricing 1="1=0.19, 10=0.162, 100=0.1295, 250=0.11328, 500=0.10354 (CAD)", RoHS="RoHS Compliant", Size / Dimension="2.20mm L x 1.40mm W", Stock 1=23262, Supplier 1=Digi-Key, Viewing Angle=120°, Wavelength - Dominant=630nm, Wavelength - Peak=643nm
F1: library part 40O_550mA_0402, "FERRITE CHIP 40 OHM 550MA 0402", DC Resistance (DCR)="120 mOhm Max", Impedance @ Frequency="40 Ohm @ 100MHz", Manufacturer="TDK Corporation", Manufacturer Part Number=MMZ1005Y400CT000, Package / Case="0402 (1005 Metric)", Supplier Part Number 1=445-2150-1-ND, Category=Filters, ComponentLink1Description=http://product.tdk.com/emc/beads/en/documents/beads_commercial_signal_mmz_en.pdf, ComponentLink1URL=http://product.tdk.com/emc/beads/en/documents/beads_commercial_signal_mmz_en.pdf, Current Rating=550mA, Filter Type="Differential Mode - Single", Height (Max)="0.022\" (0.55mm)", Mounting Type="Surface Mount", Packaging="Cut Tape (CT)", Pricing 1="1=0.14, 10=0.099, 100=0.059, 250=0.04284, 500=0.03928, 1000=0.03393, 5000=0.02679 (CAD)", RoHS="RoHS Compliant", Size / Dimension="0.039\" L x 0.020\" W (1.00mm x 0.50mm)", Stock 1=1706, Supplier 1=Digi-Key
JBP: "Connector", Manufacturer_Name=Molex, Datasheet Link=https://www.molex.com/pdm_docs/sd/768250006_sd.pdf, Height=14.53mm, Manufacturer_Part_Number=768250006
JBr1 JBr2: "Connector Header Through Hole, Right Angle 2 position 0.118 (3.00mm)", Package=None, Availability=Warning, MF=Molex, MP=436500200, Price=None, SnapEDA_Link=https://www.snapeda.com/parts/436500200/Molex/view-part/4523841/?ref=snap
JEn1 JEn2 JEn3: "Connector", Manufacturer_Name=Molex, Mouser Part Number=538-43045-0427, Arrow Part Number=43045-0427, Datasheet Link=http://www.molex.com/webdocs/datasheets/pdf/en-us//0430450427_PCB_HEADERS.pdf, Manufacturer_Part_Number=43045-0427, Mouser Price/Stock=https://www.mouser.co.uk/ProductDetail/Molex/43045-0427?qs=pWIReIhcJCQIugQJD1XCtw%3D%3D
JH1 JH2 JH3: "Connector", Manufacturer_Name=Molex, Mouser Part Number=538-43045-0600, Arrow Part Number=43045-0600, Arrow Price/Stock=https://www.arrow.com/en/products/43045-0600/molex, Datasheet Link=https://www.molex.com/pdm_docs/sd/430452227_sd.pdf, Manufacturer_Part_Number=43045-0600, Mouser Price/Stock=https://www.mouser.co.uk/ProductDetail/Molex/43045-0600?qs=mrPiglD9aYJ8CzJ%2FE2PNbw%3D%3D
JLS: "No Description Available", Built_By=Molex_Team, Copyright="Copyright (C) 2018 Accelerated Designs. All rights reserved", Manufacturer_Part_Number=1054051112, RefDes=RefDes, SourceLibrary=Add_to_database_2021-02-05, Type=DEV, Vendor="Molex Connector Corporation"
JSC1 JSC2 JSC3: "Connector", Manufacturer_Name=Molex, Mouser Part Number=538-46207-0004, Datasheet Link=https://www.molex.com/pdm_docs/sd/462070004_sd.pdf, Height=13.85mm, Manufacturer_Part_Number=46207-0004, Mouser Price/Stock=https://www.mouser.co.uk/ProductDetail/Molex/46207-0004?qs=MV7SBVuOwbsOHbr%252BXSabEQ%3D%3D
L1: library part "Ferrite_200 ohms_2A", "FILTER CHIP 220 OHM 2A 0603", Current Rating=2A, DC Resistance (DCR)="50 mOhm Max", Impedance @ Frequency="220 Ohm @ 100MHz", Manufacturer="Murata Electronics North America", Manufacturer Part Number=BLM18EG221SN1D, Package / Case="0603 (1608 Metric)", Supplier Part Number 1=490-3992-1-ND, Category=Filters, ComponentLink1Description=http://search.murata.co.jp/Ceramy/image/img/PDF/ENG/L0110S0101BLM18E.pdf, ComponentLink1URL=http://search.murata.co.jp/Ceramy/image/img/PDF/ENG/L0110S0101BLM18E.pdf, Filter Type="Differential Mode - Single", Height (Max)="0.037\" (0.95mm)", Mounting Type="Surface Mount", Packaging="Cut Tape (CT)", Pricing 1="1=0.33, 10=0.254, 50=0.1814, 100=0.1632, 250=0.13784, 500=0.12332, 1000=0.10519 (CAD)", RoHS="RoHS Compliant", Size / Dimension="0.063\" L x 0.031\" W (1.60mm x 0.80mm)", Stock 1=382631, Supplier 1=Digi-Key
P1: "Header, 5-Pin", LatestRevisionDate=17-Jul-2002, LatestRevisionNote="Re-released for DXP Platform.", Publisher="Altium Limited"
R1: library part 1M_5%_1206, "RES SMD 1M OHM 5% 1/4W 1206", Manufacturer="Panasonic Electronic Components", Manufacturer Part Number=ERJ-8GEYJ105V, Operating Temperature="-55°C ~ 155°C", Package / Case="1206 (3216 Metric)", Power (Watts)="0.25W, 1/4W", Supplier Device Package=1206, Supplier Part Number 1=P1.0MECT-ND, Temperature Coefficient=±200ppm/°C, Tolerance=±5%, Category=Resistors, ComponentLink1Description=http://industrial.panasonic.com/www-cgi/jvcr13pz.cgi?E+PZ+3+AOA0001+ERJ8GEYJ105V+7+WW, ComponentLink1URL=http://industrial.panasonic.com/www-cgi/jvcr13pz.cgi?E+PZ+3+AOA0001+ERJ8GEYJ105V+7+WW, Composition="Thick Film", Features="Automotive AEC-Q200", Height="0.028\" (0.70mm)", Number of Terminations=2, Packaging="Cut Tape (CT)", Pricing 1="1=0.14, 50=0.038, 100=0.029, 250=0.02152, 500=0.01588, 1000=0.01059, 2500=0.00894 (CAD)", Resistance (Ohms)=1M, RoHS="RoHS Compliant", Size / Dimension="0.126\" L x 0.063\" W (3.20mm x 1.60mm)", Stock 1=165352, Supplier 1=Digi-Key
R2 R3 R4 R5 R6 R7: library part 10k_1%_0402, "RES SMD 10K OHM 1% 1/10W 0402", Manufacturer="Panasonic Electronic Components", Manufacturer Part Number=ERJ-2RKF1002X, Operating Temperature="-55°C ~ 155°C", Package / Case="0402 (1005 Metric)", Power (Watts)="0.1W, 1/10W", Supplier Device Package=0402, Supplier Part Number 1=P10.0KLCT-ND, Temperature Coefficient=±100ppm/°C, Tolerance=±1%, Category=Resistors, ComponentLink1Description=http://industrial.panasonic.com/www-cgi/jvcr13pz.cgi?E+PZ+3+AOA0002+ERJ2RKF1002X+7+WW, ComponentLink1URL=http://industrial.panasonic.com/www-cgi/jvcr13pz.cgi?E+PZ+3+AOA0002+ERJ2RKF1002X+7+WW, Composition="Thick Film", Features="Automotive AEC-Q200", Height="0.016\" (0.40mm)", Number of Terminations=2, Packaging="Cut Tape (CT)", Pricing 1="1=0.14, 50=0.0282, 100=0.0215, 250=0.01592, 500=0.01176, 1000=0.00784, 5000=0.00551 (CAD)", Resistance (Ohms)=10k, RoHS="RoHS Compliant", Size / Dimension="0.039\" L x 0.020\" W (1.00mm x 0.50mm)", Stock 1=5818216, Supplier 1=Digi-Key
R8 R9: library part 27_1%_0402, "RES SMD 27 OHM 1% 1/10W 0402", Manufacturer="Panasonic Electronic Components", Manufacturer Part Number=ERJ-2RKF27R0X, Operating Temperature="-55°C ~ 155°C", Package / Case="0402 (1005 Metric)", Power (Watts)="0.1W, 1/10W", Supplier Device Package=0402, Supplier Part Number 1=P27.0LCT-ND, Temperature Coefficient=±100ppm/°C, Tolerance=±1%, Category=Resistors, ComponentLink1Description=http://industrial.panasonic.com/www-cgi/jvcr13pz.cgi?E+PZ+3+AOA0002+ERJ2RKF27R0X+7+WW, ComponentLink1URL=http://industrial.panasonic.com/www-cgi/jvcr13pz.cgi?E+PZ+3+AOA0002+ERJ2RKF27R0X+7+WW, Composition="Thick Film", Features="Automotive AEC-Q200", Height="0.016\" (0.40mm)", Number of Terminations=2, Packaging="Cut Tape (CT)", Pricing 1="1=0.16, 50=0.0234, 100=0.0171, 250=0.01308, 500=0.01048, 1000=0.00771, 5000=0.00553 (CAD)", Resistance (Ohms)=27, RoHS="RoHS Compliant", Size / Dimension="0.039\" L x 0.020\" W (1.00mm x 0.50mm)", Stock 1=490131, Supplier 1=Digi-Key
R13 R14: library part 120_1%_0402, "RES SMD 120 OHM 1% 1/10W 0402", Manufacturer="Panasonic Electronic Components", Manufacturer Part Number=ERJ-2RKF1200X, Operating Temperature="-55°C ~ 155°C", Package / Case="0402 (1005 Metric)", Power (Watts)="0.1W, 1/10W", Supplier Device Package=0402, Supplier Part Number 1=P120LCT-ND, Temperature Coefficient=±100ppm/°C, Tolerance=±1%, Category=Resistors, ComponentLink1Description=http://industrial.panasonic.com/www-cgi/jvcr13pz.cgi?E+PZ+3+AOA0002+ERJ2RKF1200X+7+WW, ComponentLink1URL=http://industrial.panasonic.com/www-cgi/jvcr13pz.cgi?E+PZ+3+AOA0002+ERJ2RKF1200X+7+WW, Composition="Thick Film", Features="Automotive AEC-Q200", Height="0.016\" (0.40mm)", Number of Terminations=2, Packaging="Cut Tape (CT)", Pricing 1="1=0.14, 50=0.0282, 100=0.0215, 250=0.01592, 500=0.01176, 1000=0.00784, 5000=0.00551 (CAD)", Resistance (Ohms)=120, RoHS="RoHS Compliant", Size / Dimension="0.039\" L x 0.020\" W (1.00mm x 0.50mm)", Stock 1=184236, Supplier 1=Digi-Key
R15 R16 R17 R18 R19 R20: library part 10k_1%_0402, "RES SMD 10K OHM 1% 1/10W 0402", Manufacturer="Panasonic Electronic Components", Manufacturer Part Number=ERJ-2RKF1002X, Operating Temperature="-55°C ~ 155°C", Package / Case="0402 (1005 Metric)", Power (Watts)="0.1W, 1/10W", Resistance (Ohms)=10k, Supplier Device Package=0402, Supplier Part Number 1=P10.0KLCT-ND, Temperature Coefficient=±100ppm/°C, Tolerance=±1%, Category=Resistors, ComponentLink1Description=http://industrial.panasonic.com/www-cgi/jvcr13pz.cgi?E+PZ+3+AOA0002+ERJ2RKF1002X+7+WW, ComponentLink1URL=http://industrial.panasonic.com/www-cgi/jvcr13pz.cgi?E+PZ+3+AOA0002+ERJ2RKF1002X+7+WW, Composition="Thick Film", Features="Automotive AEC-Q200", Height="0.016\" (0.40mm)", Number of Terminations=2, Packaging="Cut Tape (CT)", Pricing 1="1=0.14, 50=0.0282, 100=0.0215, 250=0.01592, 500=0.01176, 1000=0.00784, 5000=0.00551 (CAD)", RoHS="RoHS Compliant", Size / Dimension="0.039\" L x 0.020\" W (1.00mm x 0.50mm)", Stock 1=5818216, Supplier 1=Digi-Key
SSR SSR2: "Relay or Contactor", Manufacturer_Name="IXYS SEMICONDUCTOR", Mouser Part Number=849-CPC1017NTR, Arrow Part Number=CPC1017NTR, Arrow Price/Stock=https://www.arrow.com/en/products/cpc1017ntr/ixys, Datasheet Link=http://www.ixysic.com/home/pdfs.nsf/www/CPC1017N.pdf/$file/CPC1017N.pdf, Height=2.159mm, Manufacturer_Part_Number=CPC1017NTR, Mouser Price/Stock=https://www.mouser.co.uk/ProductDetail/IXYS-Integrated-Circuits/CPC1017NTR?qs=h2iAtNzNjMRlYN6IF%252Bl9JA%3D%3D
U1: "500 mA, Low Voltage, Low Quiescent Current LDO Regulator", Current - Limit (Min)=-, Current - Output=500mA, Manufacturer="Microchip Technology", Operating Temperature="-40°C ~ 125°C", Package / Case="TO-261-4, TO-261AA", Supplier Device Package=SOT-223-3, Supplier Part Number 1=MCP1825S-3302E/DB-ND, Voltage - Dropout (Typical)="0.21V @ 500mA", Voltage - Input="Up to 6V", Voltage - Output=3.3V, Category="Integrated Circuits (ICs)", ComponentLink1Description=http://www.microchip.com/mymicrochip/filehandler.aspx?ddocname=en531698, ComponentLink1URL=http://www.microchip.com/mymicrochip/filehandler.aspx?ddocname=en531698, Manufacturer Part Number=MCP1825S-3302E/DB, Mounting Type="Surface Mount", Number of Regulators=1, Packaging=Tube, Pricing 1="1=0.61, 10=0.51, 25=0.43, 100=0.39 (USD)", Regulator Topology="Positive Fixed", RoHS="RoHS Compliant", Stock 1=5172, Supplier 1=Digi-Key
U2: "Tiva TM4C123GH6PM Microcontroller ARM Cortex 80 MHz FPU", Supplier Part Number 1=296-35848-ND, Supplier 1=Digi-Key
U3: library part FT230XQ-R, "IC USB SERIAL BASIC UART 16QFN", Current - Supply=8mA, Manufacturer="FTDI, Future Technology Devices International Ltd", Operating Temperature="-40°C ~ 85°C", Package / Case="16-WQFN Exposed Pad", Supplier Device Package="16-QFN (4x4)", Supplier Part Number 1=768-1130-1-ND, Voltage - Supply="3.3 V ~ 5 V", Category="Integrated Circuits (ICs)", ComponentLink1Description=http://www.ftdichip.com/Support/Documents/DataSheets/ICs/DS_FT230X.pdf, ComponentLink1URL=http://www.ftdichip.com/Support/Documents/DataSheets/ICs/DS_FT230X.pdf, Function="Bridge, USB to UART", Interface=UART, Manufacturer Part Number=FT230XQ-R, Packaging="Cut Tape (CT)", Pricing 1="1=2.64, 25=2.5508, 100=2.4601, 250=2.21412, 500=1.994, 1000=1.89042, 2500=1.86128 (CAD)", Protocol=USB, RoHS="RoHS Compliant", Standards="USB 2.0", Stock 1=7567, Supplier 1=Digi-Key
USB1: library part "MOLEX 0670688010", Supplier Part Number 1=WM4064-ND, Supplier 1=Digi-Key
X1: library part 403C35E16M00000, "CRYSTAL 16MHZ 20PF SMD", ESR (Equivalent Series Resistance)="80 Ohm", Frequency=16MHz, Frequency Stability=±50ppm, Frequency Tolerance=±30ppm, Load Capacitance=20pF, Manufacturer="CTS-Frequency Controls", Operating Mode=Fundamental, Operating Temperature="-20°C ~ 70°C", Package / Case="4-SMD, No Lead (DFN, LCC)", Ratings=-, Supplier Part Number 1=CTX1293CT-ND, Category="Crystals and Oscillators", ComponentLink1Description=http://www.ctscorp.com/components/Datasheets/008-0288-0_F.pdf, ComponentLink1URL=http://www.ctscorp.com/components/Datasheets/008-0288-0_F.pdf, Height="0.031\" (0.80mm)", Manufacturer Part Number=403C35E16M00000, Mounting Type="Surface Mount", Packaging="Cut Tape (CT)", Pricing 1="1=1.07, 10=0.95, 50=0.8866, 100=0.7847, 500=0.7415, 750=0.70228, 1000=0.61988 (CAD)", RoHS="RoHS Compliant", Size / Dimension="0.126\" L x 0.098\" W (3.20mm x 2.50mm)", Stock 1=7029, Supplier 1=Digi-Key, Type="MHz Crystal"

## Free pads (board coordinates)
  round 60 hole 75: 1(1195,4600) 2(2260,1220) 3(5180,1220) 4(5185,4600)

## Via types
v1: diameter 30, hole 14, Top Layer to Bottom Layer, 106 vias
v2: diameter 50, hole 28, Top Layer to Bottom Layer, 1 vias

## Nets (pads, with @x,y where several pads share a name; then routed paths per layer and width w, separated by ;. In a path a pad name is that pad's centre, name@x,y a point inside that pad or via, vN(x,y) a via of type N, cw(c..) or ccw(c..) an arc to the next point about the centre after c; other vN are vias at no path point)
5VHS1: JH1.5 JSC1.2 | length 951.4
  Top Layer w8: JSC1.2 2550,1240 2895,1240 3115,1460 3115,1543.19 JH1.5
5VHS2: JH2.5 JSC2.2 | length 720.6
  Top Layer w15: JSC2.2 1479.65,3199.65 1575,3295 1640,3295 1701.89,3356.89 JH2.5
5VHS3: JH3.5 JSC3.2 | length 1116.4
  Bottom Layer w15: JSC3.2 2890,4535 3400.49,4535 3535.49,4400 3625,4400 3655,4370 3655,4258.78 JH3.5@3598.11,4201.89
+3.3V: C10.1 C11.1 C12.1 C13.2 C14.2 C15.2 C16.2 C17.2 C20.2 C28.2 C29.2 F1.1 R2.1 R3.1 R4.2 R5.2 R6.2 R7.2 R13.2 R14.2 R15.2 R16.2 R17.2 R18.2 R19.2 R20.2 U1.3 U2.11 U2.26 U2.37 U2.42 U2.54 U3.1 U3.8 U3.9 U3.10 | length 9427.1
  Top Layer w8: v1(3070,3520) v1@3080.15,3520 ; F1.1 F1.1@3355,4152.28 ; U2.26@3519.02,3434.69 U2.26 U2.26@3519.68,3435.36 ; R16.2 R16.2@3677.28,3277.72 ; 3675.04,3685.04 3681.27,3685.04 ; v1(4645,2876.44) v1@4645,2887.31
  Top Layer w10: F1.1@3355,4152.28 C20.2 ; U2.26@3519.02,3434.69 U2.26@3519.68,3435.36 ; 3681.27,3685.04 U2.42@3686.84,3685.04
  Top Layer w15: v1(2120,2270) 2050,2340 2050,2895 2125,2970 2677.49,2970 v1@2935,3227.51 ; R17.2 3055,3851.16 v1(3081.16,3825) 3160,3825 3197.28,3787.72 R18.2 ; v1@3080.15,3520 3134.65,3520 3220.95,3606.3 U2.11 ; F1.1@3362.08,4146.21 3368.29,4140 v1(3645,4140) 3597.28,4092.28 R2.1 ; R15.2 3420.59,3299.16 3442.5,3277.25 3442.5,3207.5 3475,3175 C17.2@3509.61,3175 ; C17.2 3527.54,3183.11 3527.54,3190.39 3555,3217.85 3555,3361.17 3519.02,3397.15 U2.26@3519.02,3434.69 ; U2.26 3519.02,3479.13 3626.5,3586.61 3678.39,3586.61 ; R2.1@3592.28,4070.79 3576.5,4055 C16.2 3576.5,3971.5 3557.39,3952.39 3557.39,3930.54 3538.7,3911.85 U2.54 3538.7,3822.61 3681.27,3685.04 ; 3675.04,3685.04 3667.72,3677.72 3667.72,3597.28 3678.39,3586.61 ; R16.2@3677.28,3277.72 3710,3245 v1(3710,3195) ; U2.42@3686.84,3685.04 U2.42 U2.42@3713.98,3685.04 ; v1(3891.8,4042.61) 3894.18,4045 3913.39,4045 3918.85,4050.47 3970,4050.47 3993.53,4074 4041.15,4074 4057.44,4057.72 R19.2 ; v1@4015,3005 v1(4015,3010) v1(4015,3140.49) ; R3.1@4073.07,3300.34 3994.66,3300.34 3878.11,3416.89 C15.2 3878.11,3448.78 C14.2 3851.58,3475.31 3834.3,3475.31 3834.3,3475.7 3750,3560 3750,3575 3744.58,3580.42 3744.58,3580.6 3738.57,3586.61 U2.37 3678.39,3586.61 ; v1@4607.5,2952.5 4622.5,2937.5 4622.5,2909.81 v1@4645,2887.31
  Top Layer w20: v1@2307.83,2265 v1(2312.83,2270)
  Bottom Layer w8: C10.1@2312.83,2375.67 C10.1@2315,2377.83 ; U1.3@2695.79,2377.83 U1.3 ; v1(3070,3520) v1@3080.2,3520 ; 4442.76,3053.11 4442.76,3054.17 ; R6.2 R6.2@4540,3055 ; v1@4593.84,2965 v1(4606.89,2965) ; v1@4636.21,2867.65 v1(4645,2876.44)
  Bottom Layer w10: R4.2 4405.83,3016.18 ; R6.2@4530,3055 R6.2
  Bottom Layer w15: v1(4015,3010) 4040,2985 R13.2 ; v1(4015,3140.49) v1(4015,3300) ; C29.2 4188.43,2616.89 4286.54,2715 ; C28.2 4286.54,2715 ; 4405.83,3016.18 4442.76,3053.11 ; 4442.76,3054.17 4473.58,3085 4510.31,3085 4523.89,3071.42 4523.89,3071.11 R6.2@4540,3055 ; R6.2 4535,2994.47 4462.59,2922.06 U3.1 U3.1@4475.96,2891.05 ; v1@4593.84,2965 4588.89,2965 4514.94,2891.05 U3.1@4475.96,2891.05 ; v1@4636.21,2867.65 R5.2 4605.99,2905.92 4625.72,2905.92 4644.8,2925 4747.72,2925 R14.2 ; v1(4645,2876.44) 4685,2836.44 R7.2 ; 4286.54,2715 U3.8 U3.9 U3.10 4284.83,2839.87 4171.51,2726.56 3868.29,2726.56 3735,2859.85 3735,2926.55 3873.45,3065 4415.73,3065 4455.73,3105 4539.17,3105 4599.37,3044.8 4599.37,3014.47 U3.1@4475.96,2891.05
  Bottom Layer w20: C12.1 2100,2290 v1(2120,2270) ; v1@2190,2277 C11.1 ; 2315,2285 2315,2377.83 U1.3@2695.79,2377.83
  other v1: 2188,2265 2930,3220
+5V: C4.2 C5.2 C6.2 C7.1 C8.1 C9.2 JEn1.4 JEn2.4 JEn3.4 L1.2 U1.1 | length 1219.3
  Top Layer w8: JEn2.4@2149.06,4242.92 JEn2.4 ; C5.2@4978.4,1951.89 4980,1953.49 C5.2 ; C4.2@5089.19,1957.99 C4.2@5095.29,1951.89
  Top Layer w15: JEn2.4@2149.06,4242.92 v2(2395,3996.98) ; L1.2 4788.4,1885 C6.2 4875,1932.18 v1(4875,1895) ; v1(4980,1895) C5.2@4980,1953.49 ; v1@5095.29,1895 C4.2@5095.29,1951.89
  Bottom Layer w8: C7.1 C7.1@2935,2567.17
  Bottom Layer w20: U1.1 2704.72,2550 2709.72,2555 v1(2825,2555) ; C7.1 v1(2930,2660) ; C7.1@2935,2567.17 C8.1 v1(3070,2646.13) ; C9.2 v1(3263.78,2541.22)
  other v1: 5095,1895
+24V: JBP.1 JBP.2 JBP.3 JSC1.3 JSC2.3 JSC3.3 SSR2.4 SSR.4 | length 385.9
  Top Layer w20: SSR.4 4175,3752.61 v1@4245,3822.61 ; SSR2.4 4765,3395 v1(4835,3395)
  other v1: 4255,3824.23
+A3.3V: C21.2 C22.2 C23.2 F1.2 U2.2 | length 688
  Top Layer w8: v1@3115,4059.46 3110,4064.46 3110.54,4065 v1(3120,4065) ; C23.2 C23.2@3257.86,4215
  Top Layer w10: C21.2 3090.54,4035 v1@3115,4059.46 ; v1(3120,4065) 3164.62,4065 3169.62,4070 3169.89,4069.73 3255.15,4155 3317.86,4155 C23.2@3257.86,4215 ; v1(3175,3960) 3153.03,3938.03 3153.03,3900 3229.89,3820.06 3234.39,3815.55 3234.39,3784.95 3235.88,3783.46 U2.2
DM: R8.1 USB1.2 | length 1025.2
  Bottom Layer w10: R8.1 4330,1913.72 USB1.2
DP: R9.1 USB1.3 | length 1067.3
  Bottom Layer w10: R9.1 4505,1860 4565,1800 4565,1700.02 USB1.3 USB1.3@4532.17,1650
ENC_PWM_A: JEn1.3 U2.57 | length 3168.8
  Top Layer w8: U2.57 3479.65,3911.45 3500,3931.81 v1(3500,3962.72) ; JEn1.3 3964.06,2864.06 4140,3040 v1(4140,3160)
  Bottom Layer w8: v1(3500,3962.72) 3504.35,3967.07 3962.93,3967.07 4035,3895 4035,3500 4140,3395 v1(4140,3160)
ENC_PWM_B: JEn2.3 U2.58 | length 1888.8
  Top Layer w8: JEn2.3@2030,4271.89 2351.89,3950 2955.2,3950 3005.2,4000 3062.67,4000 3077.7,4015.03 3196.47,4015.03 3301.44,4120 3424.02,4120 3492.6,4051.41 3492.6,4009.1 3455,3971.5 3455,3915.4 3455.28,3915.12 3455.28,3912.06 3459.96,3907.38 U2.58@3459.96,3880
  Top Layer w10: U2.58 U2.58@3459.96,3880
ENC_PWM_c: JEn3.3 U2.61 | length 1677.6
  Top Layer w8: v1@3385.47,4011.68 3400.91,3996.25 U2.61 ; v1(4435,4106.1) 4562.4,4106.1 JEn3.3
  Bottom Layer w8: v1(3385.47,4015) 3395,4015 3425,4045 3635,4045 3768.84,4178.84 4362.26,4178.84 v1(4435,4106.1)
GND: C1.2 C2.1 C3.1 C4.1 C5.1 C6.1 C7.2 C8.2 C9.1 C10.2 C11.2 C12.2 C13.1 C14.1 C15.1 C16.1 C17.1 C18.1 C19.1 C20.1 C21.1 C22.1 C23.1 C24.1 C25.1 C26.1 C27.1 C28.1 C29.1 JBP.4 JBP.5 JBP.6 JBr1.2 JBr2.2 JEn1.2 JEn2.2 JEn3.2 JH1.4 JH2.4 JH3.4 JLS.7 JLS.8 JLS.9 JLS.10 JLS.11 JLS.12 JSC1.1 JSC2.1 JSC3.1 P1.1 R1.1 SSR2.2 SSR.2 U1.2 U1.4 U2.3 U2.12 U2.27 U2.32 U2.34 U2.35 U2.39 U2.55 U3.3 U3.13 U3.17 USB1.4 X1.2 X1.4 | length 7463.9
  Top Layer w8: v1(3023.11,3185) 3020.6,3187.51 3020.6,3252.38 3077.67,3309.45 C26.1 3111.23,3340.69 C25.1 3181.76,3386.08 C24.1 ; v1(3535.14,4099.07) v1@3540.28,4093.93 ; 3540,4054.72 3540.28,4055 ; U2.34 U2.34@3709.95,3526.59 ; C18.1 3910,3668.11 3910,3698.39 X1.4@3900,3708.39 ; C27.1@3934.33,3508.11 C27.1 ; v1@3935,3450.71 v1(3935.71,3450) ; v1(4004.1,3586.61) 4004.1,3824.1 4038.27,3858.27 SSR.2 ; v1(4174.03,2680) 4190,2680 ; v1(4390,3315) 4390,3303.46 SSR2.2 ; C6.1 C6.1@4857.18,1990
  Top Layer w10: v1(2908.78,3315) 2908.78,3369.86 3015.57,3476.65 3117.47,3476.65 3227.43,3586.61 U2.12 3320.27,3586.61 3335,3601.34 3335,3733.7 3304.92,3763.78 U2.3 ; C22.1@3120,3906.22 v1(3120,3965) ; C23.1 3197.44,4240.07 3212.37,4255 3426.89,4255 JH3.4@3480,4201.89 ; U2.55 3519.02,3919.99 3538.89,3939.87 3538.89,3960.05 3540,3961.16 3540,4054.72 ; U2.27 3538.7,3403.63 3576.28,3366.05 3576.28,3195.63 C17.1 ; 3540.28,4055 v1@3540.28,4093.93 ; C17.1@3554.06,3173.41 v1(3617.47,3110) ; U2.32 3650.53,3436.02 3880.04,3206.52 3896.04,3206.52 3896.96,3205.6 4200.94,3205.6 4310.34,3315 v1(4390,3315) ; U2.35 U2.34 3745.86,3527.56 3840,3433.42 3840,3349.51 v1(3869.02,3320.5) ; U2.39 3791.54,3625.98 3805.42,3612.1 3851.89,3612.1 3873.38,3590.61 ; v1(3845,3671.85) 3863.46,3671.85 X1.4@3895,3703.39 ; C14.1 C27.1@3934.33,3508.11 ; 3872.8,3590.03 3876.21,3586.61 v1(4004.1,3586.61) ; X1.4@3900,3708.39 X1.4 3913.39,3708.39 3972.18,3767.18 3972.18,3826.43 C19.1 ; v1@3935,3450.71 C27.1 ; C6.1@4849.19,1994.21 C6.1 ; C4.1@5093.4,1990 C4.1@5095.29,1988.11
  Top Layer w15: v1@2940,4030 2945,4035 C21.1 ; C2.1 4499.06,1802.17 C3.1@4576.89,1880 ; C3.1 4577.18,2009.21 C1.2 4662.97,2095 4765.29,2095 4849.19,2011.1 C6.1@4849.19,1994.21 ; USB1.4 4782.83,1650 R1.1 ; C6.1@4857.18,1990 C5.1 C4.1@5093.4,1990
  Bottom Layer w8: C10.2@2312.83,2480 C10.2@2315,2482.17 ; v1@2470,2655 v1@2470.83,2654.17 ; v1(3535.14,4099.07) 3537.09,4099.07 v1@3543.89,4105.86 ; v1(3845,3671.85) v1@3845,3680 ; v1(4174.03,2680) v1@4185,2680
  Bottom Layer w10: U1.2 U1.2@2705.5,2465 ; v1@3845,3661.85 3840,3666.85 v1(3845,3671.85) ; v1(4149.07,2943.89) 4164.86,2928.11 4259.6,2928.11 4281.25,2949.77 4327.11,2949.77 U3.13 4349.4,2892.21 U3.17@4366.61,2875 ; U3.17@4408.11,2833.27 4455.99,2833.27 U3.3
  Bottom Layer w20: C12.2 v1@2100,2550 ; C11.2 v1(2190,2555) ; C10.2 v1(2310,2565) ; U1.4 v1@2470.83,2654.17 ; U1.2@2705.5,2465 v1(2825,2465) ; v1@2930,2373.55 C7.2 ; v1(3070,2360) C8.2 ; v1(3195,2455.25) C9.1 ; C29.1 4147.14,2653.11 v1(4174.03,2680) ; v1@4185,2680 C28.1
  other v1: 2935,2360 2100,2560 2470.83,2665 2930,4022.28
H1M1: JH1.3 U2.16 | length 2144.8
  Top Layer w10: v1(3205,3090) 3220.29,3105.29 3220.29,3262.47 3220,3262.76 3220,3295.9 3244,3319.9 3244,3431.63 3270,3457.63 U2.16@3270,3506.65
  Bottom Layer w8: v1(3205,3090) 3205,3054.82 3365,2894.82 3365,1556.97 JH1.3
H1M2: JH2.3 U2.13 | length 1772.9
  Top Layer w8: v1(2460,3415) 2473.63,3428.63 v1(2804.93,3428.63)
  Top Layer w10: JH2.3 1686.22,3300 2080,3300 2183.55,3403.55 v1@2340.55,3403.55 ; v1(3045,3446.65) 3119.21,3446.65 3239.49,3566.93 U2.13
  Bottom Layer w8: v1(2335,3403.36) 2448.36,3403.36 v1(2460,3415)
  Bottom Layer w10: v1@2818.63,3428.63 3026.98,3428.63 v1(3045,3446.65)
H1M3: JH3.3 U2.63 | length 596.3
  Top Layer w10: U2.63@3360,3875 v1(3360,3955)
  Bottom Layer w10: v1(3360,3955) 3340,3955 3325,3970 3325,4015 3463.6,4153.6 3489.74,4153.6 3514.98,4178.84 3514.98,4204.98 3535,4225 3535,4265 JH3.3@3480,4320
H2M1: JH1.2 U2.15 | length 2561.8
  Top Layer w10: v1(3260,3279.33) 3260,3425 3310,3475 3310,3512.5 3294.94,3527.56 U2.15
  Bottom Layer w10: JH1.2 3175,1475 3225,1425 3390,1425 3520,1555 3520,2625 3385.47,2759.53 3385.47,3129.53 3260,3255 v1(3260,3279.33)
H2M2: JH2.2 U2.5 | length 2423.1
  Top Layer w8: v1(2720,4090) 2835,4090 v1(2840,4095) ; v1(3135,3743.11) 3153.7,3724.41 U2.5
  Bottom Layer w8: v1(2840,4095) 2840,4020 3116.89,3743.11 v1(3135,3743.11)
  Bottom Layer w10: JH2.2 1578.11,3356.89 1530,3405 1530,3550 1560,3580 2137.43,3580 2647.43,4090 v1(2720,4090)
H2M3: JH3.2 U2.64 | length 791.3
  Top Layer w10: v1(3265,3980) 3271.85,3980 3341.85,3910 U2.64
  Bottom Layer w10: v1(3265,3980) 3415,4130 3415,4340 3455,4380 3538.11,4380 JH3.2@3598.11,4320 ; JH3.2@3600.31,4328.09 JH3.2@3604.07,4328.09
H3M1: JH1.1 U2.14 | length 2284.1
  Top Layer w8: v1(3120,2815) 3120,3028.78 2975,3173.78 2975,3275.32 3246.93,3547.24 U2.14
  Bottom Layer w8: JH1.1 3120,1548.19 v1(3120,2815)
H3M2: JH2.1 U2.62 | length 2301.2
  Top Layer w10: v1(2870,3790) 2897.57,3790 v1(3005,3897.43) v1@2997.57,3897.43 ; v1(3271.85,3919.99) 3317.86,3873.98 3317.86,3849.57 3331.39,3836.04 3366.19,3836.04 3381.22,3851.07 U2.62
  Bottom Layer w10: JH2.1 1680,3420 1775,3420 1910,3285 2564,3285 2870,3591 v1(2870,3790) ; v1(3005,3897.43) 3027.57,3920 v1@3271.84,3920
H3M3: JH3.1 U2.43 | length 1801.2
  Top Layer w10: JH3.1@3708.11,4319.92 3708.11,4518.11 3809,4619 3975.1,4619 4025,4569.1 4025,4345 4135,4235 4135,4085 4143.36,4076.64 4143.36,3958.36 4105,3920 3949.36,3920 3937.43,3908.07 3935.71,3908.07 3891.8,3864.16 3891.8,3823.72 3890.95,3823.72 3879.31,3812.08 3879.31,3810.82 3773.22,3704.72 U2.43
NetD1_1: D1.1 R13.1 | length 74
  Bottom Layer w10: D1.1 R13.1
NetD2_1: D2.1 R14.1 | length 267.4
  Bottom Layer w10: D2.1 4740,2708.31 4793.98,2762.28 R14.1
NetR6_1: R6.1 U3.16 | length 157.9
  Bottom Layer w10: U3.16 4499.57,3000.86 R6.1
NetR7_1: R7.1 U3.4 | length 236.8
  Bottom Layer w10: U3.4 4475.72,2814.28 4510.43,2779.57 R7.1
NetR8_2: R8.2 U3.7 | length 97.1
  Bottom Layer w10: R8.2 4352.72,2712.72 4374.57,2734.57 4374.57,2777.44 U3.7
NetR9_2: R9.2 U3.6 | length 156.2
  Bottom Layer w10: U3.6 4405.27,2773.18 4405.27,2746.93 4462.2,2690 R9.2
NO1: JLS.1 R15.1 U2.23 | length 4054.3
  Top Layer w8: JLS.1@1768.43,3734.43 1770.78,3734.43 1835,3670.2 v1(1835,3630) ; v1(3310,2820) v1(3442.5,2820) ; U2.23 3459.96,3396.32 R15.1 3406.95,3356.95 3395,3345 3395,3300 3420.59,3274.41 3420.59,3187.76 3445,3163.35 3454.39,3163.35 3545,3072.74 v1(3545,3060)
  Bottom Layer w8: v1(1835,3630) 1450,3630 1340,3520 1340,3260 1445,3155 1760,3155 1850,3245 2595.04,3245 2860.04,2980 3150,2980 v1(3310,2820) ; v1(3442.5,2820) 3442.5,2957.5 v1(3545,3060)
NO2: JLS.2 R16.1 U2.24 | length 3096.8
  Top Layer w8: JLS.2 1856.85,3848.15 2065,3640 v1(2065,3460) 2070,3460 v1@2075,3455 ; v1(2200,3365) 2200,3355 2290,3265 v1@2635,3265 ; v1(3238.43,2951.57) 3300,2890 v1(3500,2890) ; U2.24 3479.65,3395.51 3460,3375.86 3460,3269.18 v1(3485,3244.18) ; v1(3630,3211.91) 3664.05,3245.95 R16.1
  Bottom Layer w8: v1(2065,3460) 2150,3375 v1@2190,3375 ; v1(2635,3275) 2635,3245 2850,3030 3160,3030 v1(3238.43,2951.57) ; v1(3485,3244.18) 3517.27,3211.91 v1(3630,3211.91) 3648.09,3211.91 3665,3195 3665,3110 3500,2945 v1(3500,2890)
NO3: JLS.3 R17.1 U2.1 | length 1749.6
  Top Layer w8: JLS.3 1770,3945 v1(1905,3945) ; v1(2365,3850) 2908.99,3850 3018.99,3960 3048.25,3960 3083.25,3995 3195,3995 3220.29,3969.71 3220.29,3852.86 U2.1
  Bottom Layer w8: v1(1905,3945) 2270,3945 v1(2365,3850)
NO4: JLS.4 R18.1 U2.4 | length 1675.4